# EAGLE board sparkfun-atsamd21g-breakout-Panel-v10 (EAGLE 7.4.0), part 1 of 11
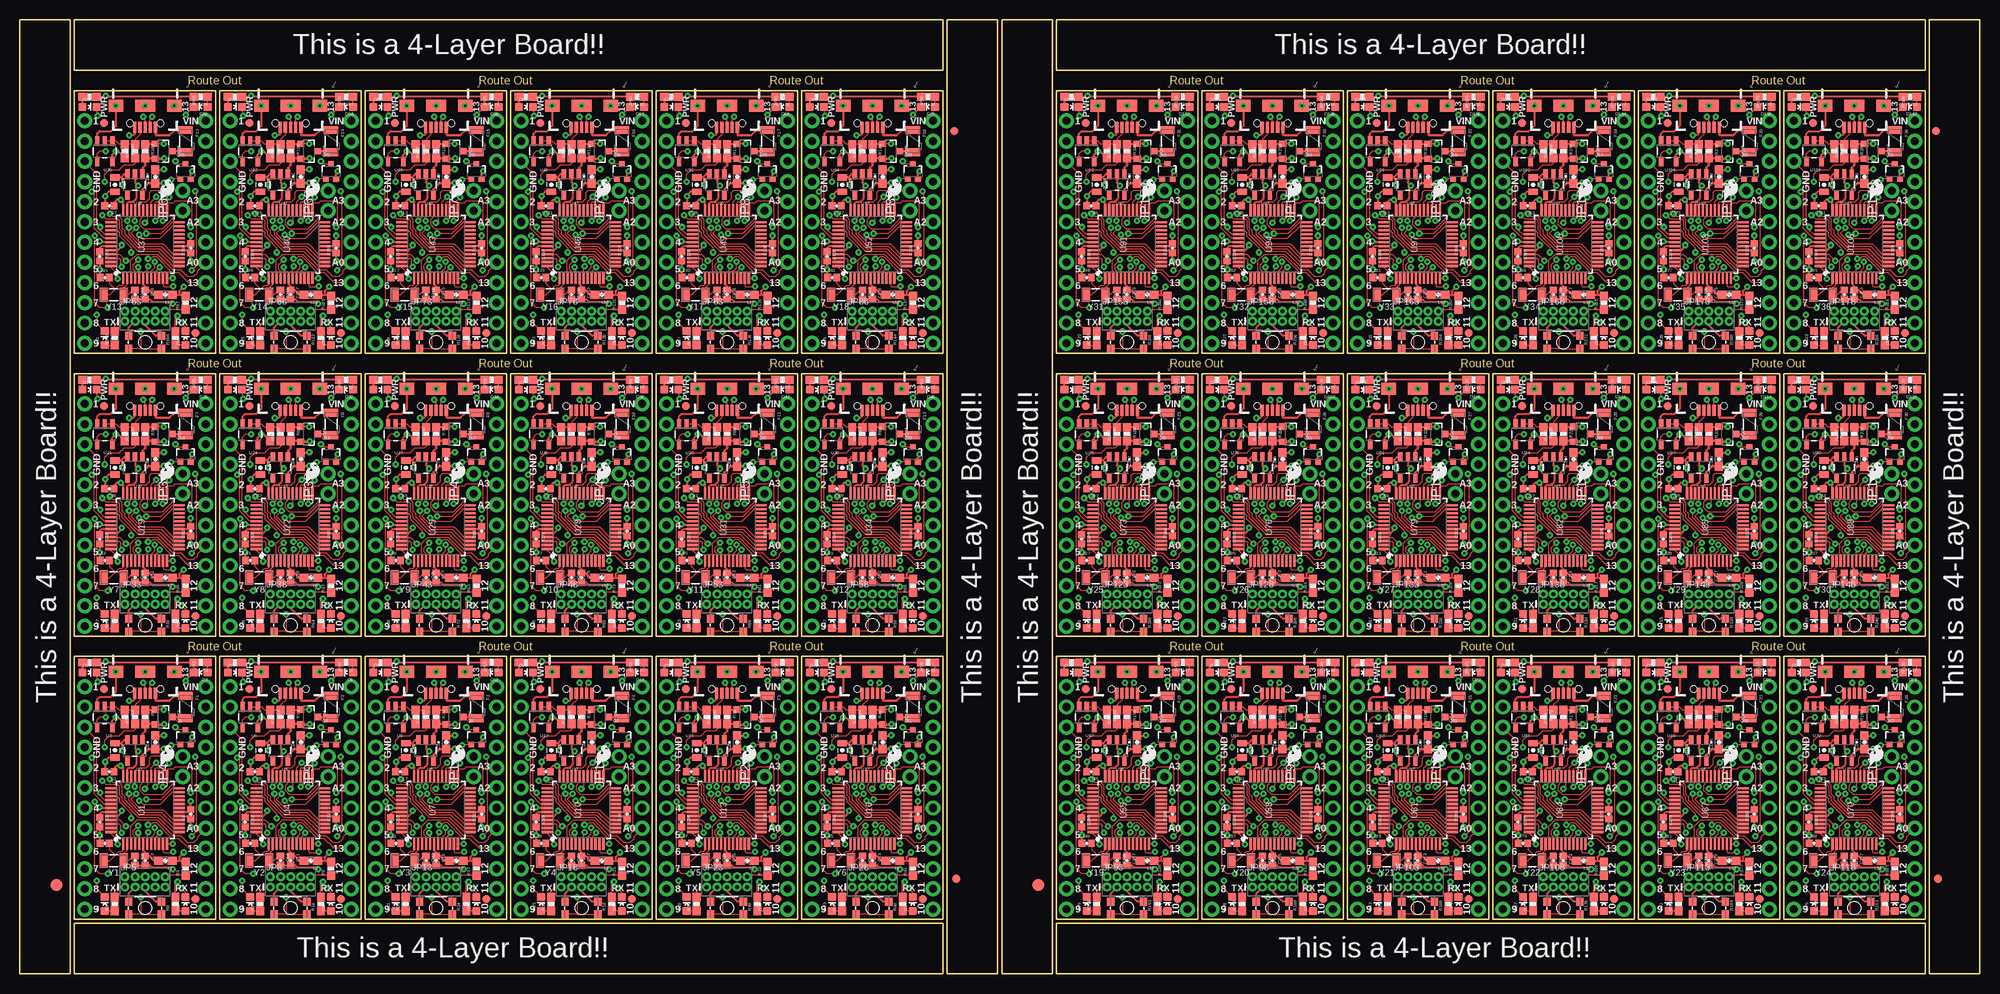
[diagram p0: board, top side]
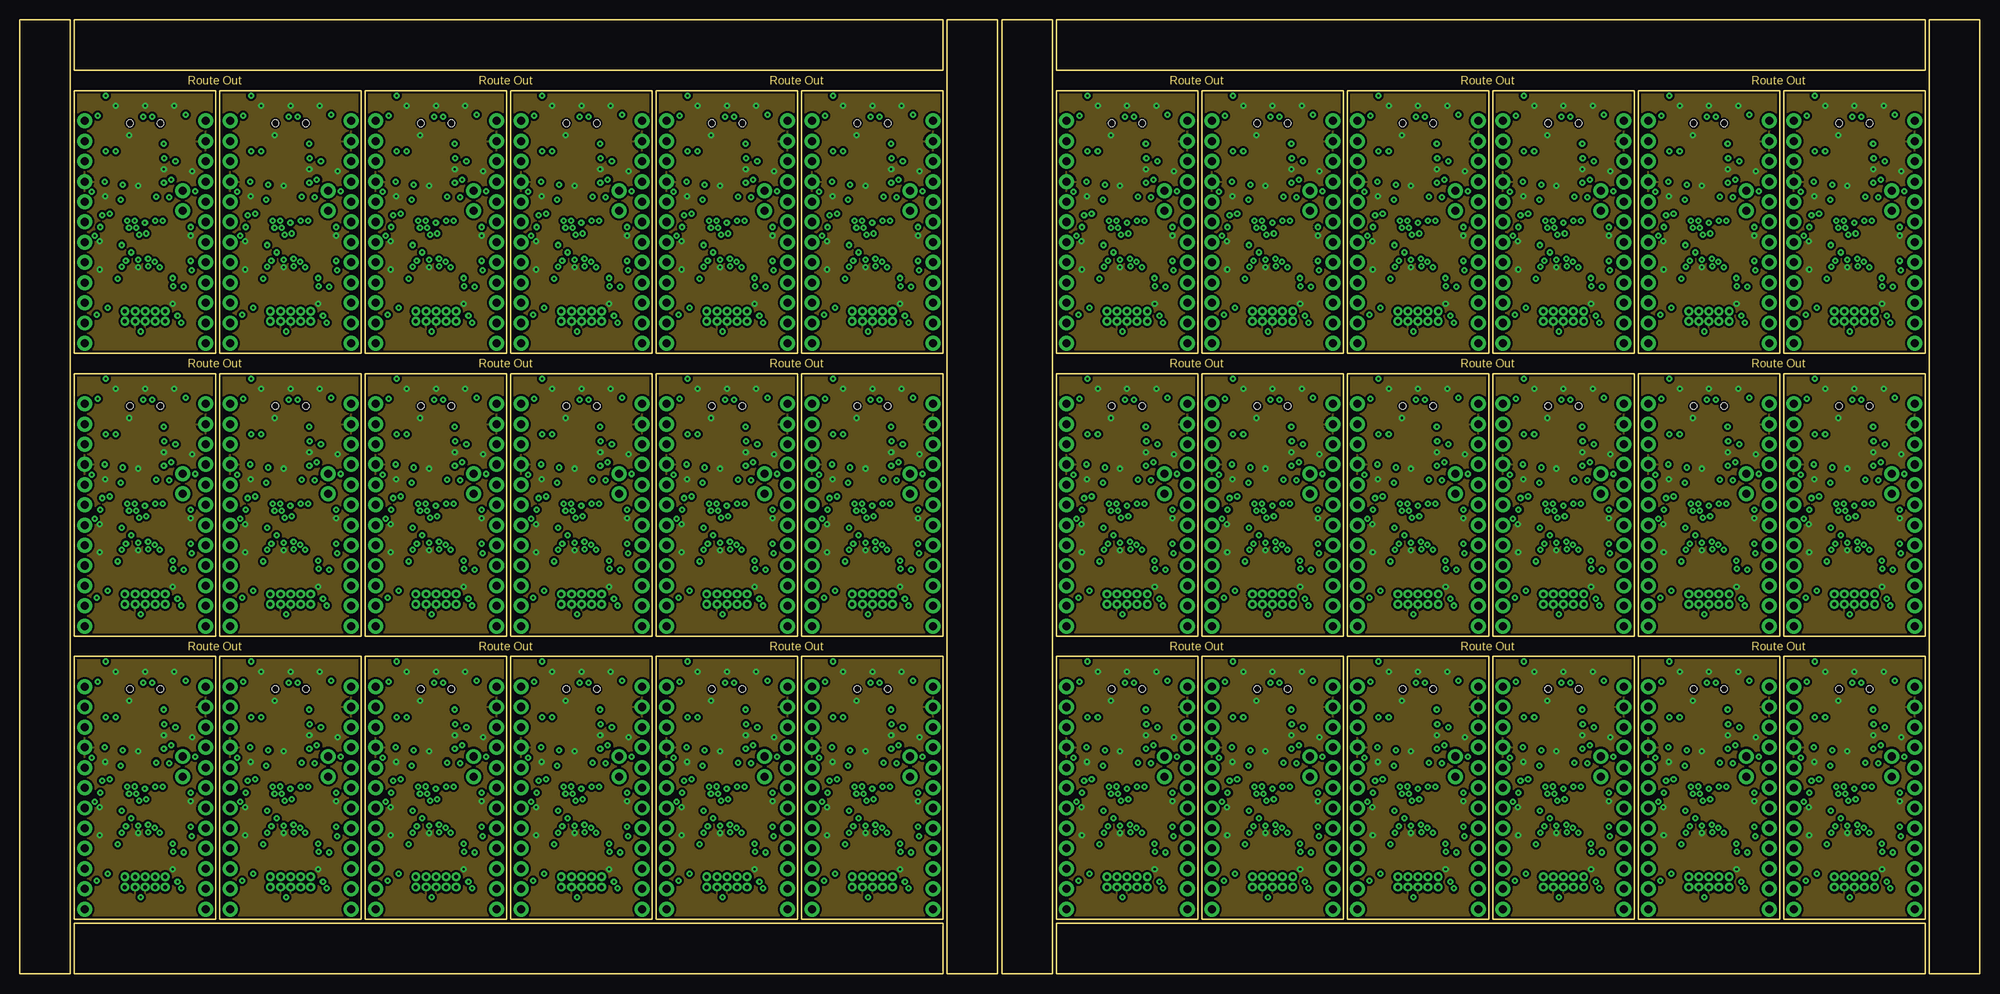
[diagram p1: board, inner layer Route2]
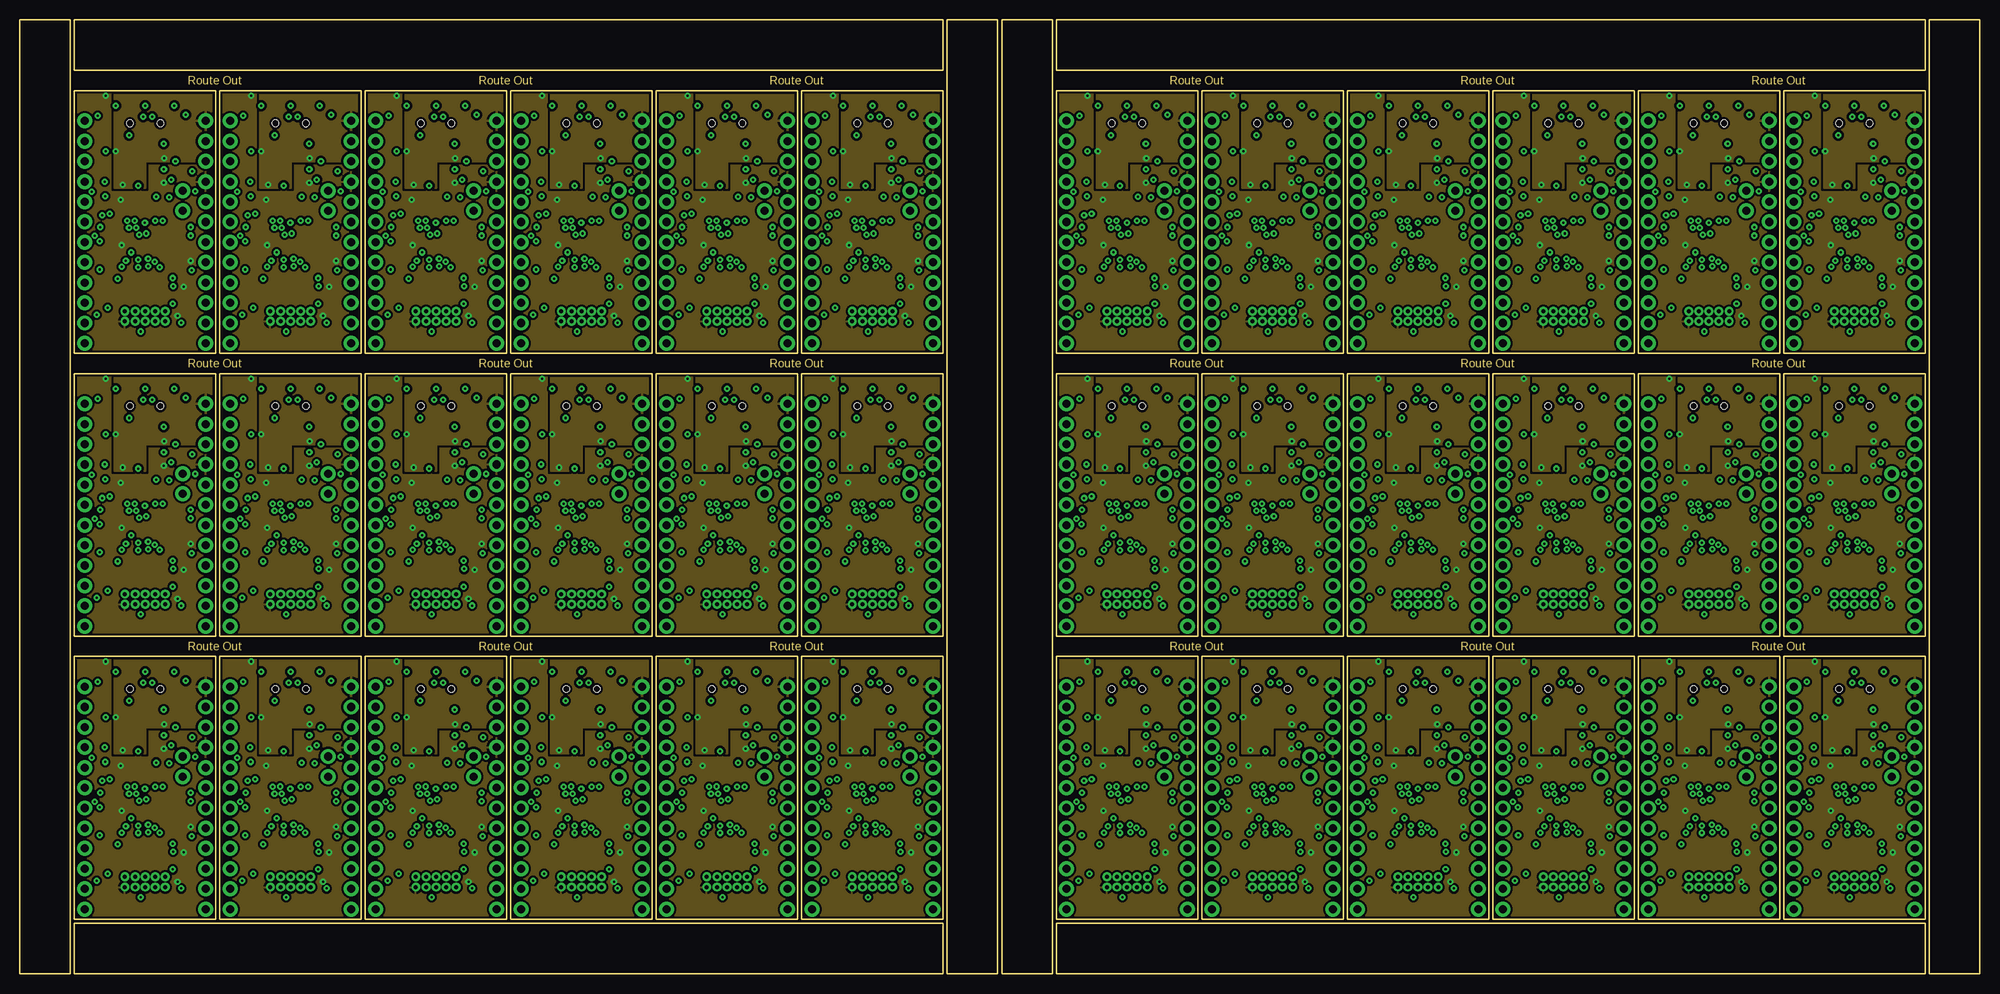
[diagram p2: board, inner layer Route15]
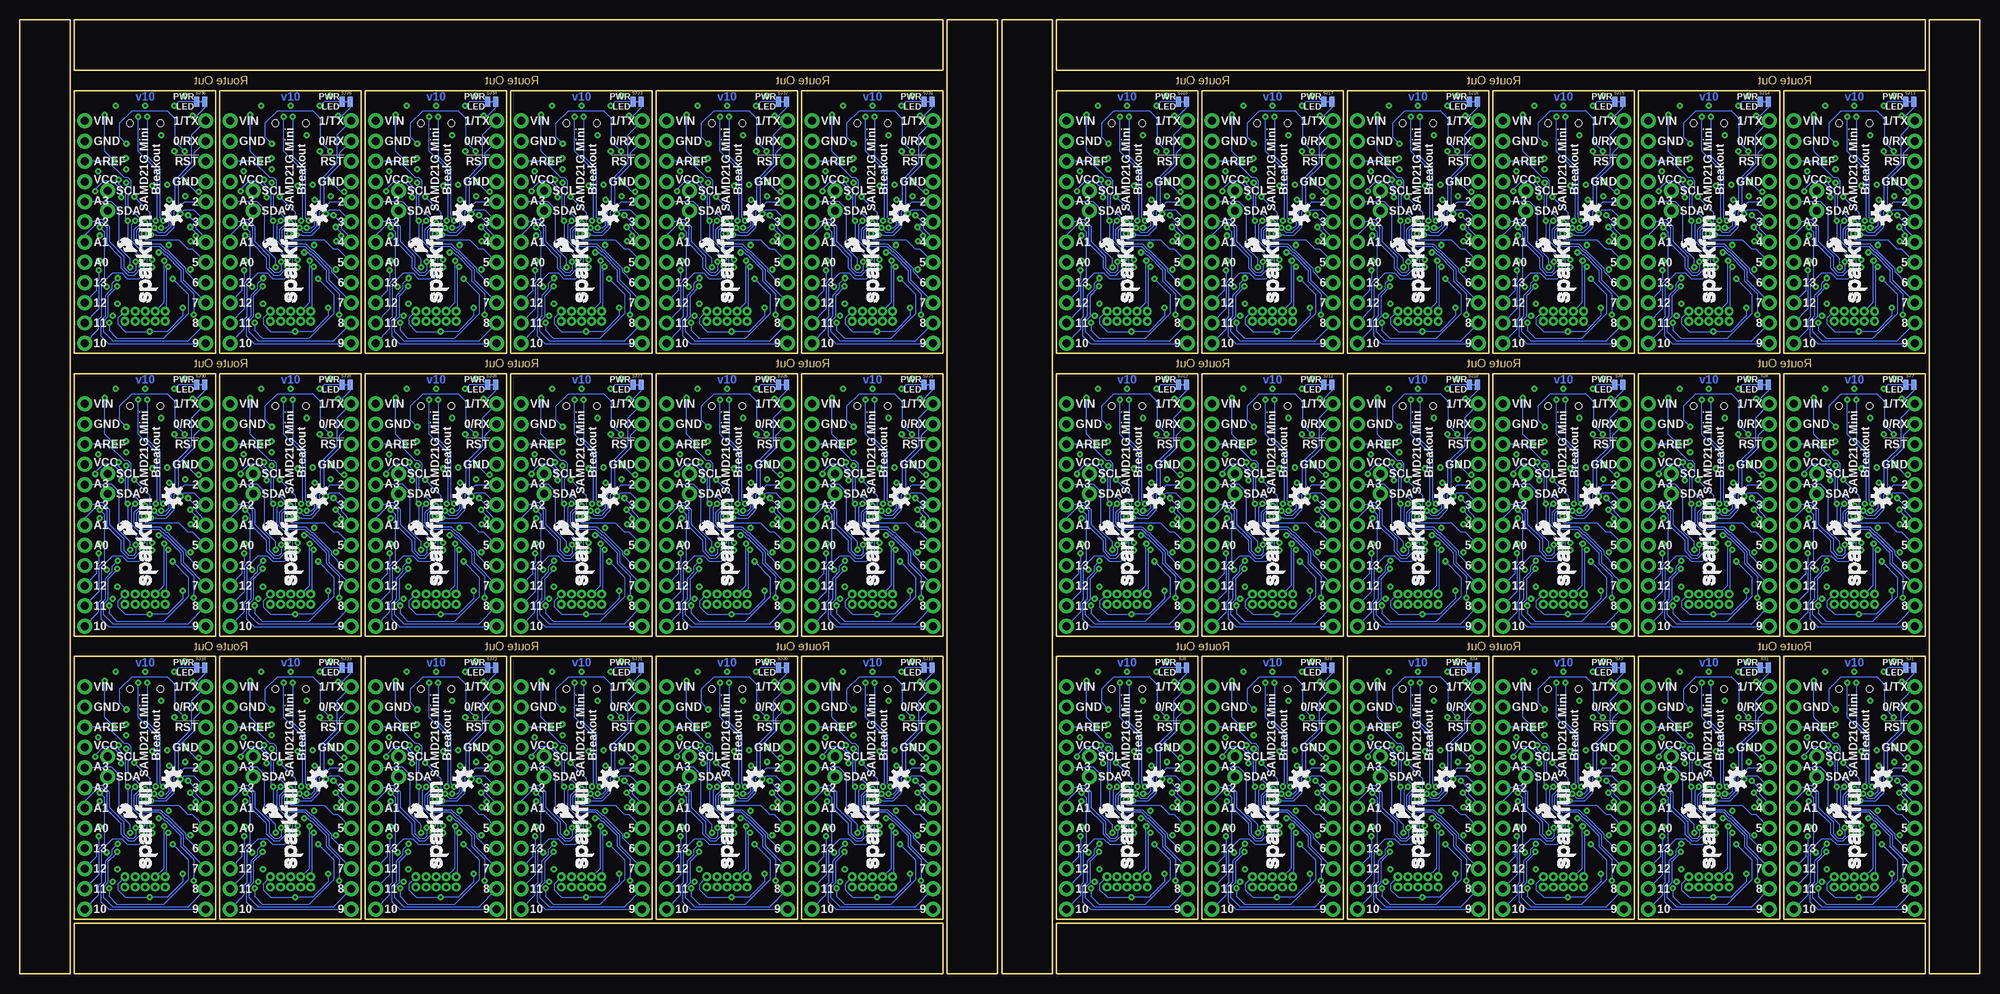
[diagram p3: board, bottom side, seen from below]

Size 246.38 x 119.89 mm. Coordinates in mm from the lower left corner, seen from the top.
Outline: 192 segments
Copper layers (1*2*15*16): Top 0.035mm / dielectric 1.5mm / Route2 0.035mm / dielectric 0.15mm / Route15 0.035mm / dielectric 0.2mm / Bottom 0.035mm
Design rules "SparkFun-4-layer *": minimum track width 6mil, minimum drill 10mil, track to track 6mil, track to pad 6mil, pad to pad 6mil, via to via 6mil, smd to smd 6mil, copper to edge 6mil, drill to drill 8mil, minimum pad ring 12mil, minimum via ring 10mil, stop-mask expansion 4mil, vias tented up to drill 20mil, thermal gap 12mil

## Footprints (pad centres in the part's own frame; a part is rotated, then mirrored left to right if it is on the bottom)
0402-CAP = smd 0.85 x 0.9: 1 -0.58,0; 2 0.58,0
0805-CAP = smd 0.8 x 1.2: 1 -0.9,0; 2 0.9,0
0603-CAP = smd 1.1 x 1: 1 -0.85,0; 2 0.85,0
LED-0603 = smd 1 x 1: A 0,-0.877; C 0,0.877
FIDUCIAL-1.5X3 = smd 1.5 x 1.5: 1 0,0
FIDUCIAL-1X2 = smd 1 x 1: 1 0,0
PTC-1206 = smd 1 x 1.8: 1 -1.4,0; 2 1.4,0
1X12_NO_SILK = drill 1.016 pad 1.88: 1 0,0; 2 2.54,0; 3 5.08,0; 4 7.62,0; 5 10.16,0; 6 12.7,0; 7 15.24,0; 8 17.78,0; 9 20.32,0; 10 22.86,0; 11 25.4,0; 12 27.94,0
USB-AB-MICRO-SMD_V03 = smd 1.4 x 0.4: D+1 2.7,0; D-1 2.7,0.65; GND1 2.7,-1.3; ID1 2.7,-0.65; VBUS1 2.7,1.3 | smd 1.5 x 1.8: SHIELD1 0,3.68; SHIELD3 0,-3.68 | smd 1.5 x 2.5: SHIELD2 0,0 | hole 0.85: 2.2,1.9; 2.2,-1.9
1X02_NO_SILK = drill 1.016 pad 1.88: 1 0,0; 2 2.54,0
2X5-PTH-1.27MM = drill 0.508 pad 1: 1 -2.54,-0.635; 2 -2.54,0.635; 3 -1.27,-0.635; 4 -1.27,0.635; 5 0,-0.635; 6 0,0.635; 7 1.27,-0.635; 8 1.27,0.635; 9 2.54,-0.635; 10 2.54,0.635
0603 = smd 1.1 x 1: 1 -0.85,0; 2 0.85,0
SOT323 = smd 0.7 x 0.7: 1 -0.65,-0.925; 2 0.65,-0.925; 3 0,0.925
SOT23-3 = smd 0.8 x 0.9: 1 -0.95,-1; 2 0.95,-1; 3 0,1.1
0603-RES = smd 1.1 x 1: 1 -0.85,0; 2 0.85,0
TACTILE_SWITCH_SMD_4.6X2.8MM = smd 0.9 x 1: 1 -2.05,-0.8; 2 2.05,-0.8; 3 2.05,0.8; 4 -2.05,0.8
PAD-JUMPER-2-NC_BY_TRACE_NO_SILK = smd 0.635 x 1.27: 1 -0.508,0; 2 0.508,0
TQFP-48 = smd 1.5 x 0.28: 1 -4.25,2.75; 2 -4.25,2.25; 3 -4.25,1.75; 4 -4.25,1.25; 5 -4.25,0.75; 6 -4.25,0.25; 7 -4.25,-0.25; 8 -4.25,-0.75; 9 -4.25,-1.25; 10 -4.25,-1.75; 11 -4.25,-2.25; 12 -4.25,-2.75; 25 4.25,-2.75; 26 4.25,-2.25; 27 4.25,-1.75; 28 4.25,-1.25; 29 4.25,-0.75; 30 4.25,-0.25; 31 4.25,0.25; 32 4.25,0.75; 33 4.25,1.25; 34 4.25,1.75; 35 4.25,2.25; 36 4.25,2.75 | smd 0.28 x 1.5: 13 -2.75,-4.25; 14 -2.25,-4.25; 15 -1.75,-4.25; 16 -1.25,-4.25; 17 -0.75,-4.25; 18 -0.25,-4.25; 19 0.25,-4.25; 20 0.75,-4.25; 21 1.25,-4.25; 22 1.75,-4.25; 23 2.25,-4.25; 24 2.75,-4.25; 37 2.75,4.25; 38 2.25,4.25; 39 1.75,4.25; 40 1.25,4.25; 41 0.75,4.25; 42 0.25,4.25; 43 -0.25,4.25; 44 -0.75,4.25; 45 -1.25,4.25; 46 -1.75,4.25; 47 -2.25,4.25; 48 -2.75,4.25
SOT23-5 = smd 0.55 x 1.2: 1 -0.95,-1.3; 2 0,-1.3; 3 0.95,-1.3; 4 0.95,1.3; 5 -0.95,1.3
CRYSTAL-SMD-3.2X1.5MM = smd 1 x 1.8: P$1 -1.25,0; P$2 1.25,0

## Placement (x,y rotation side)
C1  0.1uF  [0402-CAP]  11.25,25.4 180 top
C2  0.1uF  [0402-CAP]  10.03,19.05 270 top
C3  0.1uF  [0402-CAP]  15.75,14.22 270 top
C4  0.1uF  [0402-CAP]  21.46,20.07 90 top
C5  15pF  [0402-CAP]  10.67,16.38 0 top
C6  15pF  [0402-CAP]  14.48,14.22 270 top
C7  1.0uF  [0805-CAP]  11.94,28.07 270 top
C8  2.2uF  [0603-CAP]  17.02,29.08 90 top
C9  0.1uF  [0402-CAP]  29.54,25.4 180 top
C10  0.1uF  [0402-CAP]  28.32,19.05 270 top
C11  0.1uF  [0402-CAP]  34.04,14.22 270 top
C12  0.1uF  [0402-CAP]  39.75,20.07 90 top
C13  15pF  [0402-CAP]  28.96,16.38 0 top
C14  15pF  [0402-CAP]  32.77,14.22 270 top
C15  1.0uF  [0805-CAP]  30.23,28.07 270 top
C16  2.2uF  [0603-CAP]  35.31,29.08 90 top
C17  0.1uF  [0402-CAP]  47.83,25.4 180 top
C18  0.1uF  [0402-CAP]  46.61,19.05 270 top
C19  0.1uF  [0402-CAP]  52.32,14.22 270 top
C20  0.1uF  [0402-CAP]  58.04,20.07 90 top
C21  15pF  [0402-CAP]  47.24,16.38 0 top
C22  15pF  [0402-CAP]  51.05,14.22 270 top
C23  1.0uF  [0805-CAP]  48.51,28.07 270 top
C24  2.2uF  [0603-CAP]  53.59,29.08 90 top
C25  0.1uF  [0402-CAP]  66.12,25.4 180 top
C26  0.1uF  [0402-CAP]  64.9,19.05 270 top
C27  0.1uF  [0402-CAP]  70.61,14.22 270 top
C28  0.1uF  [0402-CAP]  76.33,20.07 90 top
C29  15pF  [0402-CAP]  65.53,16.38 0 top
C30  15pF  [0402-CAP]  69.34,14.22 270 top
C31  1.0uF  [0805-CAP]  66.8,28.07 270 top
C32  2.2uF  [0603-CAP]  71.88,29.08 90 top
C33  0.1uF  [0402-CAP]  84.4,25.4 180 top
C34  0.1uF  [0402-CAP]  83.19,19.05 270 top
C35  0.1uF  [0402-CAP]  88.9,14.22 270 top
C36  0.1uF  [0402-CAP]  94.61,20.07 90 top
C37  15pF  [0402-CAP]  83.82,16.38 0 top
C38  15pF  [0402-CAP]  87.63,14.22 270 top
C39  1.0uF  [0805-CAP]  85.09,28.07 270 top
C40  2.2uF  [0603-CAP]  90.17,29.08 90 top
C41  0.1uF  [0402-CAP]  102.69,25.4 180 top
C42  0.1uF  [0402-CAP]  101.47,19.05 270 top
C43  0.1uF  [0402-CAP]  107.19,14.22 270 top
C44  0.1uF  [0402-CAP]  112.9,20.07 90 top
C45  15pF  [0402-CAP]  102.11,16.38 0 top
C46  15pF  [0402-CAP]  105.92,14.22 270 top
C47  1.0uF  [0805-CAP]  103.38,28.07 270 top
C48  2.2uF  [0603-CAP]  108.46,29.08 90 top
C49  0.1uF  [0402-CAP]  11.25,60.96 180 top
C50  0.1uF  [0402-CAP]  10.03,54.61 270 top
C51  0.1uF  [0402-CAP]  15.75,49.78 270 top
C52  0.1uF  [0402-CAP]  21.46,55.63 90 top
C53  15pF  [0402-CAP]  10.67,51.94 0 top
C54  15pF  [0402-CAP]  14.48,49.78 270 top
C55  1.0uF  [0805-CAP]  11.94,63.63 270 top
C56  2.2uF  [0603-CAP]  17.02,64.64 90 top
C57  0.1uF  [0402-CAP]  29.54,60.96 180 top
C58  0.1uF  [0402-CAP]  28.32,54.61 270 top
C59  0.1uF  [0402-CAP]  34.04,49.78 270 top
C60  0.1uF  [0402-CAP]  39.75,55.63 90 top
C61  15pF  [0402-CAP]  28.96,51.94 0 top
C62  15pF  [0402-CAP]  32.77,49.78 270 top
C63  1.0uF  [0805-CAP]  30.23,63.63 270 top
C64  2.2uF  [0603-CAP]  35.31,64.64 90 top
C65  0.1uF  [0402-CAP]  47.83,60.96 180 top
C66  0.1uF  [0402-CAP]  46.61,54.61 270 top
C67  0.1uF  [0402-CAP]  52.32,49.78 270 top
C68  0.1uF  [0402-CAP]  58.04,55.63 90 top
C69  15pF  [0402-CAP]  47.24,51.94 0 top
C70  15pF  [0402-CAP]  51.05,49.78 270 top
C71  1.0uF  [0805-CAP]  48.51,63.63 270 top
C72  2.2uF  [0603-CAP]  53.59,64.64 90 top
C73  0.1uF  [0402-CAP]  66.12,60.96 180 top
C74  0.1uF  [0402-CAP]  64.9,54.61 270 top
C75  0.1uF  [0402-CAP]  70.61,49.78 270 top
C76  0.1uF  [0402-CAP]  76.33,55.63 90 top
C77  15pF  [0402-CAP]  65.53,51.94 0 top
C78  15pF  [0402-CAP]  69.34,49.78 270 top
C79  1.0uF  [0805-CAP]  66.8,63.63 270 top
C80  2.2uF  [0603-CAP]  71.88,64.64 90 top
C81  0.1uF  [0402-CAP]  84.4,60.96 180 top
C82  0.1uF  [0402-CAP]  83.19,54.61 270 top
C83  0.1uF  [0402-CAP]  88.9,49.78 270 top
C84  0.1uF  [0402-CAP]  94.61,55.63 90 top
C85  15pF  [0402-CAP]  83.82,51.94 0 top
C86  15pF  [0402-CAP]  87.63,49.78 270 top
C87  1.0uF  [0805-CAP]  85.09,63.63 270 top
C88  2.2uF  [0603-CAP]  90.17,64.64 90 top
C89  0.1uF  [0402-CAP]  102.69,60.96 180 top
C90  0.1uF  [0402-CAP]  101.47,54.61 270 top
C91  0.1uF  [0402-CAP]  107.19,49.78 270 top
C92  0.1uF  [0402-CAP]  112.9,55.63 90 top
C93  15pF  [0402-CAP]  102.11,51.94 0 top
C94  15pF  [0402-CAP]  105.92,49.78 270 top
C95  1.0uF  [0805-CAP]  103.38,63.63 270 top
C96  2.2uF  [0603-CAP]  108.46,64.64 90 top
C97  0.1uF  [0402-CAP]  11.25,96.52 180 top
C98  0.1uF  [0402-CAP]  10.03,90.17 270 top
C99  0.1uF  [0402-CAP]  15.75,85.34 270 top
C100  0.1uF  [0402-CAP]  21.46,91.19 90 top
C101  15pF  [0402-CAP]  10.67,87.5 0 top
C102  15pF  [0402-CAP]  14.48,85.34 270 top
C103  1.0uF  [0805-CAP]  11.94,99.19 270 top
C104  2.2uF  [0603-CAP]  17.02,100.2 90 top
C105  0.1uF  [0402-CAP]  29.54,96.52 180 top
C106  0.1uF  [0402-CAP]  28.32,90.17 270 top
C107  0.1uF  [0402-CAP]  34.04,85.34 270 top
C108  0.1uF  [0402-CAP]  39.75,91.19 90 top
C109  15pF  [0402-CAP]  28.96,87.5 0 top
C110  15pF  [0402-CAP]  32.77,85.34 270 top
C111  1.0uF  [0805-CAP]  30.23,99.19 270 top
C112  2.2uF  [0603-CAP]  35.31,100.2 90 top
C113  0.1uF  [0402-CAP]  47.83,96.52 180 top
C114  0.1uF  [0402-CAP]  46.61,90.17 270 top
C115  0.1uF  [0402-CAP]  52.32,85.34 270 top
C116  0.1uF  [0402-CAP]  58.04,91.19 90 top
C117  15pF  [0402-CAP]  47.24,87.5 0 top
C118  15pF  [0402-CAP]  51.05,85.34 270 top
C119  1.0uF  [0805-CAP]  48.51,99.19 270 top
C120  2.2uF  [0603-CAP]  53.59,100.2 90 top
C121  0.1uF  [0402-CAP]  66.12,96.52 180 top
C122  0.1uF  [0402-CAP]  64.9,90.17 270 top
C123  0.1uF  [0402-CAP]  70.61,85.34 270 top
C124  0.1uF  [0402-CAP]  76.33,91.19 90 top
C125  15pF  [0402-CAP]  65.53,87.5 0 top
C126  15pF  [0402-CAP]  69.34,85.34 270 top
C127  1.0uF  [0805-CAP]  66.8,99.19 270 top
C128  2.2uF  [0603-CAP]  71.88,100.2 90 top
C129  0.1uF  [0402-CAP]  84.4,96.52 180 top
C130  0.1uF  [0402-CAP]  83.19,90.17 270 top
C131  0.1uF  [0402-CAP]  88.9,85.34 270 top
C132  0.1uF  [0402-CAP]  94.61,91.19 90 top
C133  15pF  [0402-CAP]  83.82,87.5 0 top
C134  15pF  [0402-CAP]  87.63,85.34 270 top
C135  1.0uF  [0805-CAP]  85.09,99.19 270 top
C136  2.2uF  [0603-CAP]  90.17,100.2 90 top
C137  0.1uF  [0402-CAP]  102.69,96.52 180 top
C138  0.1uF  [0402-CAP]  101.47,90.17 270 top
C139  0.1uF  [0402-CAP]  107.19,85.34 270 top
C140  0.1uF  [0402-CAP]  112.9,91.19 90 top
C141  15pF  [0402-CAP]  102.11,87.5 0 top
C142  15pF  [0402-CAP]  105.92,85.34 270 top
C143  1.0uF  [0805-CAP]  103.38,99.19 270 top
C144  2.2uF  [0603-CAP]  108.46,100.2 90 top
C145  0.1uF  [0402-CAP]  134.7,25.4 180 top
C146  0.1uF  [0402-CAP]  133.48,19.05 270 top
C147  0.1uF  [0402-CAP]  139.19,14.22 270 top
C148  0.1uF  [0402-CAP]  144.91,20.07 90 top
C149  15pF  [0402-CAP]  134.11,16.38 0 top
C150  15pF  [0402-CAP]  137.92,14.22 270 top
C151  1.0uF  [0805-CAP]  135.38,28.07 270 top
C152  2.2uF  [0603-CAP]  140.46,29.08 90 top
C153  0.1uF  [0402-CAP]  152.98,25.4 180 top
C154  0.1uF  [0402-CAP]  151.76,19.05 270 top
C155  0.1uF  [0402-CAP]  157.48,14.22 270 top
C156  0.1uF  [0402-CAP]  163.19,20.07 90 top
C157  15pF  [0402-CAP]  152.4,16.38 0 top
C158  15pF  [0402-CAP]  156.21,14.22 270 top
C159  1.0uF  [0805-CAP]  153.67,28.07 270 top
C160  2.2uF  [0603-CAP]  158.75,29.08 90 top
C161  0.1uF  [0402-CAP]  171.27,25.4 180 top
C162  0.1uF  [0402-CAP]  170.05,19.05 270 top
C163  0.1uF  [0402-CAP]  175.77,14.22 270 top
C164  0.1uF  [0402-CAP]  181.48,20.07 90 top
C165  15pF  [0402-CAP]  170.69,16.38 0 top
C166  15pF  [0402-CAP]  174.5,14.22 270 top
C167  1.0uF  [0805-CAP]  171.96,28.07 270 top
C168  2.2uF  [0603-CAP]  177.04,29.08 90 top
C169  0.1uF  [0402-CAP]  189.56,25.4 180 top
C170  0.1uF  [0402-CAP]  188.34,19.05 270 top
C171  0.1uF  [0402-CAP]  194.06,14.22 270 top
C172  0.1uF  [0402-CAP]  199.77,20.07 90 top
C173  15pF  [0402-CAP]  188.98,16.38 0 top
C174  15pF  [0402-CAP]  192.79,14.22 270 top
C175  1.0uF  [0805-CAP]  190.25,28.07 270 top
C176  2.2uF  [0603-CAP]  195.33,29.08 90 top
C177  0.1uF  [0402-CAP]  207.85,25.4 180 top
C178  0.1uF  [0402-CAP]  206.63,19.05 270 top
C179  0.1uF  [0402-CAP]  212.34,14.22 270 top
C180  0.1uF  [0402-CAP]  218.06,20.07 90 top
C181  15pF  [0402-CAP]  207.26,16.38 0 top
C182  15pF  [0402-CAP]  211.07,14.22 270 top
C183  1.0uF  [0805-CAP]  208.53,28.07 270 top
C184  2.2uF  [0603-CAP]  213.61,29.08 90 top
C185  0.1uF  [0402-CAP]  226.14,25.4 180 top
C186  0.1uF  [0402-CAP]  224.92,19.05 270 top
C187  0.1uF  [0402-CAP]  230.63,14.22 270 top
C188  0.1uF  [0402-CAP]  236.35,20.07 90 top
C189  15pF  [0402-CAP]  225.55,16.38 0 top
C190  15pF  [0402-CAP]  229.36,14.22 270 top
C191  1.0uF  [0805-CAP]  226.82,28.07 270 top
C192  2.2uF  [0603-CAP]  231.9,29.08 90 top
C193  0.1uF  [0402-CAP]  134.7,60.96 180 top
C194  0.1uF  [0402-CAP]  133.48,54.61 270 top
C195  0.1uF  [0402-CAP]  139.19,49.78 270 top
C196  0.1uF  [0402-CAP]  144.91,55.63 90 top
C197  15pF  [0402-CAP]  134.11,51.94 0 top
C198  15pF  [0402-CAP]  137.92,49.78 270 top
C199  1.0uF  [0805-CAP]  135.38,63.63 270 top
C200  2.2uF  [0603-CAP]  140.46,64.64 90 top
C201  0.1uF  [0402-CAP]  152.98,60.96 180 top
C202  0.1uF  [0402-CAP]  151.76,54.61 270 top
C203  0.1uF  [0402-CAP]  157.48,49.78 270 top
C204  0.1uF  [0402-CAP]  163.19,55.63 90 top
C205  15pF  [0402-CAP]  152.4,51.94 0 top
C206  15pF  [0402-CAP]  156.21,49.78 270 top
C207  1.0uF  [0805-CAP]  153.67,63.63 270 top
C208  2.2uF  [0603-CAP]  158.75,64.64 90 top
C209  0.1uF  [0402-CAP]  171.27,60.96 180 top
C210  0.1uF  [0402-CAP]  170.05,54.61 270 top
C211  0.1uF  [0402-CAP]  175.77,49.78 270 top
C212  0.1uF  [0402-CAP]  181.48,55.63 90 top
C213  15pF  [0402-CAP]  170.69,51.94 0 top
C214  15pF  [0402-CAP]  174.5,49.78 270 top
C215  1.0uF  [0805-CAP]  171.96,63.63 270 top
C216  2.2uF  [0603-CAP]  177.04,64.64 90 top
C217  0.1uF  [0402-CAP]  189.56,60.96 180 top
C218  0.1uF  [0402-CAP]  188.34,54.61 270 top
C219  0.1uF  [0402-CAP]  194.06,49.78 270 top
C220  0.1uF  [0402-CAP]  199.77,55.63 90 top
C221  15pF  [0402-CAP]  188.98,51.94 0 top
C222  15pF  [0402-CAP]  192.79,49.78 270 top
C223  1.0uF  [0805-CAP]  190.25,63.63 270 top
C224  2.2uF  [0603-CAP]  195.33,64.64 90 top
C225  0.1uF  [0402-CAP]  207.85,60.96 180 top
C226  0.1uF  [0402-CAP]  206.63,54.61 270 top
C227  0.1uF  [0402-CAP]  212.34,49.78 270 top
C228  0.1uF  [0402-CAP]  218.06,55.63 90 top
C229  15pF  [0402-CAP]  207.26,51.94 0 top
C230  15pF  [0402-CAP]  211.07,49.78 270 top
C231  1.0uF  [0805-CAP]  208.53,63.63 270 top
C232  2.2uF  [0603-CAP]  213.61,64.64 90 top
C233  0.1uF  [0402-CAP]  226.14,60.96 180 top
C234  0.1uF  [0402-CAP]  224.92,54.61 270 top
C235  0.1uF  [0402-CAP]  230.63,49.78 270 top
C236  0.1uF  [0402-CAP]  236.35,55.63 90 top
C237  15pF  [0402-CAP]  225.55,51.94 0 top
C238  15pF  [0402-CAP]  229.36,49.78 270 top
C239  1.0uF  [0805-CAP]  226.82,63.63 270 top
C240  2.2uF  [0603-CAP]  231.9,64.64 90 top
C241  0.1uF  [0402-CAP]  134.7,96.52 180 top
C242  0.1uF  [0402-CAP]  133.48,90.17 270 top
C243  0.1uF  [0402-CAP]  139.19,85.34 270 top
C244  0.1uF  [0402-CAP]  144.91,91.19 90 top
C245  15pF  [0402-CAP]  134.11,87.5 0 top
C246  15pF  [0402-CAP]  137.92,85.34 270 top
C247  1.0uF  [0805-CAP]  135.38,99.19 270 top
C248  2.2uF  [0603-CAP]  140.46,100.2 90 top
C249  0.1uF  [0402-CAP]  152.98,96.52 180 top
C250  0.1uF  [0402-CAP]  151.76,90.17 270 top
C251  0.1uF  [0402-CAP]  157.48,85.34 270 top
C252  0.1uF  [0402-CAP]  163.19,91.19 90 top
C253  15pF  [0402-CAP]  152.4,87.5 0 top
C254  15pF  [0402-CAP]  156.21,85.34 270 top
C255  1.0uF  [0805-CAP]  153.67,99.19 270 top
C256  2.2uF  [0603-CAP]  158.75,100.2 90 top
C257  0.1uF  [0402-CAP]  171.27,96.52 180 top
C258  0.1uF  [0402-CAP]  170.05,90.17 270 top
C259  0.1uF  [0402-CAP]  175.77,85.34 270 top
C260  0.1uF  [0402-CAP]  181.48,91.19 90 top
C261  15pF  [0402-CAP]  170.69,87.5 0 top
C262  15pF  [0402-CAP]  174.5,85.34 270 top
C263  1.0uF  [0805-CAP]  171.96,99.19 270 top
C264  2.2uF  [0603-CAP]  177.04,100.2 90 top
C265  0.1uF  [0402-CAP]  189.56,96.52 180 top
C266  0.1uF  [0402-CAP]  188.34,90.17 270 top
C267  0.1uF  [0402-CAP]  194.06,85.34 270 top
C268  0.1uF  [0402-CAP]  199.77,91.19 90 top
C269  15pF  [0402-CAP]  188.98,87.5 0 top
C270  15pF  [0402-CAP]  192.79,85.34 270 top
C271  1.0uF  [0805-CAP]  190.25,99.19 270 top
C272  2.2uF  [0603-CAP]  195.33,100.2 90 top
C273  0.1uF  [0402-CAP]  207.85,96.52 180 top
C274  0.1uF  [0402-CAP]  206.63,90.17 270 top
C275  0.1uF  [0402-CAP]  212.34,85.34 270 top
C276  0.1uF  [0402-CAP]  218.06,91.19 90 top
C277  15pF  [0402-CAP]  207.26,87.5 0 top
C278  15pF  [0402-CAP]  211.07,85.34 270 top
C279  1.0uF  [0805-CAP]  208.53,99.19 270 top
C280  2.2uF  [0603-CAP]  213.61,100.2 90 top
C281  0.1uF  [0402-CAP]  226.14,96.52 180 top
C282  0.1uF  [0402-CAP]  224.92,90.17 270 top
C283  0.1uF  [0402-CAP]  230.63,85.34 270 top
C284  0.1uF  [0402-CAP]  236.35,91.19 90 top
C285  15pF  [0402-CAP]  225.55,87.5 0 top
C286  15pF  [0402-CAP]  229.36,85.34 270 top
C287  1.0uF  [0805-CAP]  226.82,99.19 270 top
C288  2.2uF  [0603-CAP]  231.9,100.2 90 top
D1  GREEN  [LED-0603]  10.67,8.76 0 top
D2  RED  [LED-0603]  8.76,37.85 270 top
D3  BLUE  [LED-0603]  22.73,37.85 90 top
D4  Yellow  [LED-0603]  20.83,8.76 0 top
D5  RED  [LED-0603]  27.05,37.85 270 top
D6  BLUE  [LED-0603]  41.02,37.85 90 top
D7  GREEN  [LED-0603]  28.96,8.76 0 top
D8  Yellow  [LED-0603]  39.12,8.76 0 top
D9  RED  [LED-0603]  45.34,37.85 270 top
D10  BLUE  [LED-0603]  59.31,37.85 90 top
D11  GREEN  [LED-0603]  47.24,8.76 0 top
D12  Yellow  [LED-0603]  57.4,8.76 0 top
D13  RED  [LED-0603]  63.63,37.85 270 top
D14  BLUE  [LED-0603]  77.6,37.85 90 top
D15  GREEN  [LED-0603]  65.53,8.76 0 top
D16  Yellow  [LED-0603]  75.69,8.76 0 top
D17  RED  [LED-0603]  81.92,37.85 270 top
D18  BLUE  [LED-0603]  95.89,37.85 90 top
D19  GREEN  [LED-0603]  83.82,8.76 0 top
D20  Yellow  [LED-0603]  93.98,8.76 0 top
D21  RED  [LED-0603]  100.2,37.85 270 top
D22  BLUE  [LED-0603]  114.17,37.85 90 top
D23  GREEN  [LED-0603]  102.11,8.76 0 top
D24  Yellow  [LED-0603]  112.27,8.76 0 top
D25  RED  [LED-0603]  8.76,73.41 270 top
D26  BLUE  [LED-0603]  22.73,73.41 90 top
D27  GREEN  [LED-0603]  10.67,44.32 0 top
D28  Yellow  [LED-0603]  20.83,44.32 0 top
D29  RED  [LED-0603]  27.05,73.41 270 top
D30  BLUE  [LED-0603]  41.02,73.41 90 top
D31  GREEN  [LED-0603]  28.96,44.32 0 top
D32  Yellow  [LED-0603]  39.12,44.32 0 top
D33  RED  [LED-0603]  45.34,73.41 270 top
D34  BLUE  [LED-0603]  59.31,73.41 90 top
D35  GREEN  [LED-0603]  47.24,44.32 0 top
D36  Yellow  [LED-0603]  57.4,44.32 0 top
D37  RED  [LED-0603]  63.63,73.41 270 top
D38  BLUE  [LED-0603]  77.6,73.41 90 top
D39  GREEN  [LED-0603]  65.53,44.32 0 top
D40  Yellow  [LED-0603]  75.69,44.32 0 top
D41  RED  [LED-0603]  81.92,73.41 270 top
D42  BLUE  [LED-0603]  95.89,73.41 90 top
D43  GREEN  [LED-0603]  83.82,44.32 0 top
D44  Yellow  [LED-0603]  93.98,44.32 0 top
D45  RED  [LED-0603]  100.2,73.41 270 top
D46  BLUE  [LED-0603]  114.17,73.41 90 top
D47  GREEN  [LED-0603]  102.11,44.32 0 top
D48  Yellow  [LED-0603]  112.27,44.32 0 top
D49  RED  [LED-0603]  8.76,108.97 270 top
D50  BLUE  [LED-0603]  22.73,108.97 90 top
D51  GREEN  [LED-0603]  10.67,79.88 0 top
D52  Yellow  [LED-0603]  20.83,79.88 0 top
D53  RED  [LED-0603]  27.05,108.97 270 top
D54  BLUE  [LED-0603]  41.02,108.97 90 top
D55  GREEN  [LED-0603]  28.96,79.88 0 top
D56  Yellow  [LED-0603]  39.12,79.88 0 top
D57  RED  [LED-0603]  45.34,108.97 270 top
D58  BLUE  [LED-0603]  59.31,108.97 90 top
D59  GREEN  [LED-0603]  47.24,79.88 0 top
D60  Yellow  [LED-0603]  57.4,79.88 0 top
D61  RED  [LED-0603]  63.63,108.97 270 top
D62  BLUE  [LED-0603]  77.6,108.97 90 top
D63  GREEN  [LED-0603]  65.53,79.88 0 top
D64  Yellow  [LED-0603]  75.69,79.88 0 top
D65  RED  [LED-0603]  81.92,108.97 270 top
D66  BLUE  [LED-0603]  95.89,108.97 90 top
D67  GREEN  [LED-0603]  83.82,79.88 0 top
D68  Yellow  [LED-0603]  93.98,79.88 0 top
D69  RED  [LED-0603]  100.2,108.97 270 top
D70  BLUE  [LED-0603]  114.17,108.97 90 top
D71  GREEN  [LED-0603]  102.11,79.88 0 top
D72  Yellow  [LED-0603]  112.27,79.88 0 top
D73  RED  [LED-0603]  132.21,37.85 270 top
D74  BLUE  [LED-0603]  146.18,37.85 90 top
D75  GREEN  [LED-0603]  134.11,8.76 0 top
D76  Yellow  [LED-0603]  144.27,8.76 0 top
D77  RED  [LED-0603]  150.5,37.85 270 top
D78  BLUE  [LED-0603]  164.47,37.85 90 top
D79  GREEN  [LED-0603]  152.4,8.76 0 top
D80  Yellow  [LED-0603]  162.56,8.76 0 top
D81  RED  [LED-0603]  168.78,37.85 270 top
D82  BLUE  [LED-0603]  182.75,37.85 90 top
D83  GREEN  [LED-0603]  170.69,8.76 0 top
D84  Yellow  [LED-0603]  180.85,8.76 0 top
D85  RED  [LED-0603]  187.07,37.85 270 top
D86  BLUE  [LED-0603]  201.04,37.85 90 top
D87  GREEN  [LED-0603]  188.98,8.76 0 top
D88  Yellow  [LED-0603]  199.14,8.76 0 top
D89  RED  [LED-0603]  205.36,37.85 270 top
D90  BLUE  [LED-0603]  219.33,37.85 90 top
D91  GREEN  [LED-0603]  207.26,8.76 0 top
D92  Yellow  [LED-0603]  217.42,8.76 0 top
D93  RED  [LED-0603]  223.65,37.85 270 top
D94  BLUE  [LED-0603]  237.62,37.85 90 top
D95  GREEN  [LED-0603]  225.55,8.76 0 top
D96  Yellow  [LED-0603]  235.71,8.76 0 top
D97  RED  [LED-0603]  132.21,73.41 270 top
D98  BLUE  [LED-0603]  146.18,73.41 90 top
D99  GREEN  [LED-0603]  134.11,44.32 0 top
D100  Yellow  [LED-0603]  144.27,44.32 0 top
D101  RED  [LED-0603]  150.5,73.41 270 top
D102  BLUE  [LED-0603]  164.47,73.41 90 top
D103  GREEN  [LED-0603]  152.4,44.32 0 top
D104  Yellow  [LED-0603]  162.56,44.32 0 top
D105  RED  [LED-0603]  168.78,73.41 270 top
D106  BLUE  [LED-0603]  182.75,73.41 90 top
D107  GREEN  [LED-0603]  170.69,44.32 0 top
D108  Yellow  [LED-0603]  180.85,44.32 0 top
D109  RED  [LED-0603]  187.07,73.41 270 top
D110  BLUE  [LED-0603]  201.04,73.41 90 top
D111  GREEN  [LED-0603]  188.98,44.32 0 top
D112  Yellow  [LED-0603]  199.14,44.32 0 top
D113  RED  [LED-0603]  205.36,73.41 270 top
D114  BLUE  [LED-0603]  219.33,73.41 90 top
D115  GREEN  [LED-0603]  207.26,44.32 0 top
D116  Yellow  [LED-0603]  217.42,44.32 0 top
D117  RED  [LED-0603]  223.65,73.41 270 top
D118  BLUE  [LED-0603]  237.62,73.41 90 top
D119  GREEN  [LED-0603]  225.55,44.32 0 top
D120  Yellow  [LED-0603]  235.71,44.32 0 top
D121  RED  [LED-0603]  132.21,108.97 270 top
D122  BLUE  [LED-0603]  146.18,108.97 90 top
D123  GREEN  [LED-0603]  134.11,79.88 0 top
D124  Yellow  [LED-0603]  144.27,79.88 0 top
D125  RED  [LED-0603]  150.5,108.97 270 top
D126  BLUE  [LED-0603]  164.47,108.97 90 top
D127  GREEN  [LED-0603]  152.4,79.88 0 top
D128  Yellow  [LED-0603]  162.56,79.88 0 top
D129  RED  [LED-0603]  168.78,108.97 270 top
D130  BLUE  [LED-0603]  182.75,108.97 90 top
D131  GREEN  [LED-0603]  170.69,79.88 0 top
D132  Yellow  [LED-0603]  180.85,79.88 0 top
D133  RED  [LED-0603]  187.07,108.97 270 top
D134  BLUE  [LED-0603]  201.04,108.97 90 top
D135  GREEN  [LED-0603]  188.98,79.88 0 top
D136  Yellow  [LED-0603]  199.14,79.88 0 top
D137  RED  [LED-0603]  205.36,108.97 270 top
D138  BLUE  [LED-0603]  219.33,108.97 90 top
D139  GREEN  [LED-0603]  207.26,79.88 0 top
D140  Yellow  [LED-0603]  217.42,79.88 0 top
D141  RED  [LED-0603]  223.65,108.97 270 top
D142  BLUE  [LED-0603]  237.62,108.97 90 top
D143  GREEN  [LED-0603]  225.55,79.88 0 top
D144  Yellow  [LED-0603]  235.71,79.88 0 top
E$1  [FIDUCIAL-1.5X3]  4.57,11.18 0 top
E$2  [FIDUCIAL-1X2]  241.17,11.94 0 top
E$3  [FIDUCIAL-1X2]  240.92,105.92 180 top
E$4  [FIDUCIAL-1.5X3]  128.02,11.18 0 top
E$5  [FIDUCIAL-1X2]  117.73,11.94 0 top
E$6  [FIDUCIAL-1X2]  117.47,105.92 180 top
F1  500mA  [PTC-1206]  20.83,33.53 270 top
F2  500mA  [PTC-1206]  39.12,33.53 270 top
F3  500mA  [PTC-1206]  57.4,33.53 270 top
F4  500mA  [PTC-1206]  75.69,33.53 270 top
F5  500mA  [PTC-1206]  93.98,33.53 270 top
F6  500mA  [PTC-1206]  112.27,33.53 270 top
F7  500mA  [PTC-1206]  20.83,69.09 270 top
F8  500mA  [PTC-1206]  39.12,69.09 270 top
F9  500mA  [PTC-1206]  57.4,69.09 270 top
F10  500mA  [PTC-1206]  75.69,69.09 270 top
F11  500mA  [PTC-1206]  93.98,69.09 270 top
F12  500mA  [PTC-1206]  112.27,69.09 270 top
F13  500mA  [PTC-1206]  20.83,104.65 270 top
F14  500mA  [PTC-1206]  39.12,104.65 270 top
F15  500mA  [PTC-1206]  57.4,104.65 270 top
F16  500mA  [PTC-1206]  75.69,104.65 270 top
F17  500mA  [PTC-1206]  93.98,104.65 270 top
F18  500mA  [PTC-1206]  112.27,104.65 270 top
F19  500mA  [PTC-1206]  144.27,33.53 270 top
F20  500mA  [PTC-1206]  162.56,33.53 270 top
F21  500mA  [PTC-1206]  180.85,33.53 270 top
F22  500mA  [PTC-1206]  199.14,33.53 270 top
F23  500mA  [PTC-1206]  217.42,33.53 270 top
F24  500mA  [PTC-1206]  235.71,33.53 270 top
F25  500mA  [PTC-1206]  144.27,69.09 270 top
F26  500mA  [PTC-1206]  162.56,69.09 270 top
F27  500mA  [PTC-1206]  180.85,69.09 270 top
F28  500mA  [PTC-1206]  199.14,69.09 270 top
F29  500mA  [PTC-1206]  217.42,69.09 270 top
F30  500mA  [PTC-1206]  235.71,69.09 270 top
F31  500mA  [PTC-1206]  144.27,104.65 270 top
F32  500mA  [PTC-1206]  162.56,104.65 270 top
F33  500mA  [PTC-1206]  180.85,104.65 270 top
F34  500mA  [PTC-1206]  199.14,104.65 270 top
F35  500mA  [PTC-1206]  217.42,104.65 270 top
F36  500mA  [PTC-1206]  235.71,104.65 270 top
FID1  FIDUCIAL1X2  [FIDUCIAL-1X2]  22.1,9.4 0 top
FID2  FIDUCIAL1X2  [FIDUCIAL-1X2]  10.54,35.81 0 top
FID3  FIDUCIAL1X2  [FIDUCIAL-1X2]  40.39,9.4 0 top
FID4  FIDUCIAL1X2  [FIDUCIAL-1X2]  28.83,35.81 0 top
FID5  FIDUCIAL1X2  [FIDUCIAL-1X2]  58.67,9.4 0 top
FID6  FIDUCIAL1X2  [FIDUCIAL-1X2]  47.12,35.81 0 top
FID7  FIDUCIAL1X2  [FIDUCIAL-1X2]  76.96,9.4 0 top
FID8  FIDUCIAL1X2  [FIDUCIAL-1X2]  65.41,35.81 0 top
FID9  FIDUCIAL1X2  [FIDUCIAL-1X2]  95.25,9.4 0 top
FID10  FIDUCIAL1X2  [FIDUCIAL-1X2]  83.69,35.81 0 top
FID11  FIDUCIAL1X2  [FIDUCIAL-1X2]  113.54,9.4 0 top
FID12  FIDUCIAL1X2  [FIDUCIAL-1X2]  101.98,35.81 0 top
FID13  FIDUCIAL1X2  [FIDUCIAL-1X2]  22.1,44.96 0 top
FID14  FIDUCIAL1X2  [FIDUCIAL-1X2]  10.54,71.37 0 top
FID15  FIDUCIAL1X2  [FIDUCIAL-1X2]  40.39,44.96 0 top
FID16  FIDUCIAL1X2  [FIDUCIAL-1X2]  28.83,71.37 0 top
FID17  FIDUCIAL1X2  [FIDUCIAL-1X2]  58.67,44.96 0 top
FID18  FIDUCIAL1X2  [FIDUCIAL-1X2]  47.12,71.37 0 top
FID19  FIDUCIAL1X2  [FIDUCIAL-1X2]  76.96,44.96 0 top
FID20  FIDUCIAL1X2  [FIDUCIAL-1X2]  65.41,71.37 0 top
FID21  FIDUCIAL1X2  [FIDUCIAL-1X2]  95.25,44.96 0 top
FID22  FIDUCIAL1X2  [FIDUCIAL-1X2]  83.69,71.37 0 top
FID23  FIDUCIAL1X2  [FIDUCIAL-1X2]  113.54,44.96 0 top
FID24  FIDUCIAL1X2  [FIDUCIAL-1X2]  101.98,71.37 0 top
FID25  FIDUCIAL1X2  [FIDUCIAL-1X2]  22.1,80.52 0 top
FID26  FIDUCIAL1X2  [FIDUCIAL-1X2]  10.54,106.93 0 top
FID27  FIDUCIAL1X2  [FIDUCIAL-1X2]  40.39,80.52 0 top
FID28  FIDUCIAL1X2  [FIDUCIAL-1X2]  28.83,106.93 0 top
FID29  FIDUCIAL1X2  [FIDUCIAL-1X2]  58.67,80.52 0 top
FID30  FIDUCIAL1X2  [FIDUCIAL-1X2]  47.12,106.93 0 top
FID31  FIDUCIAL1X2  [FIDUCIAL-1X2]  76.96,80.52 0 top
FID32  FIDUCIAL1X2  [FIDUCIAL-1X2]  65.41,106.93 0 top
FID33  FIDUCIAL1X2  [FIDUCIAL-1X2]  95.25,80.52 0 top
FID34  FIDUCIAL1X2  [FIDUCIAL-1X2]  83.69,106.93 0 top
FID35  FIDUCIAL1X2  [FIDUCIAL-1X2]  113.54,80.52 0 top
FID36  FIDUCIAL1X2  [FIDUCIAL-1X2]  101.98,106.93 0 top
FID37  FIDUCIAL1X2  [FIDUCIAL-1X2]  145.54,9.4 0 top
FID38  FIDUCIAL1X2  [FIDUCIAL-1X2]  133.99,35.81 0 top
FID39  FIDUCIAL1X2  [FIDUCIAL-1X2]  163.83,9.4 0 top
FID40  FIDUCIAL1X2  [FIDUCIAL-1X2]  152.27,35.81 0 top
FID41  FIDUCIAL1X2  [FIDUCIAL-1X2]  182.12,9.4 0 top
FID42  FIDUCIAL1X2  [FIDUCIAL-1X2]  170.56,35.81 0 top
FID43  FIDUCIAL1X2  [FIDUCIAL-1X2]  200.41,9.4 0 top
FID44  FIDUCIAL1X2  [FIDUCIAL-1X2]  188.85,35.81 0 top
FID45  FIDUCIAL1X2  [FIDUCIAL-1X2]  218.69,9.4 0 top
FID46  FIDUCIAL1X2  [FIDUCIAL-1X2]  207.14,35.81 0 top
FID47  FIDUCIAL1X2  [FIDUCIAL-1X2]  236.98,9.4 0 top
FID48  FIDUCIAL1X2  [FIDUCIAL-1X2]  225.43,35.81 0 top
FID49  FIDUCIAL1X2  [FIDUCIAL-1X2]  145.54,44.96 0 top
FID50  FIDUCIAL1X2  [FIDUCIAL-1X2]  133.99,71.37 0 top
FID51  FIDUCIAL1X2  [FIDUCIAL-1X2]  163.83,44.96 0 top
FID52  FIDUCIAL1X2  [FIDUCIAL-1X2]  152.27,71.37 0 top
FID53  FIDUCIAL1X2  [FIDUCIAL-1X2]  182.12,44.96 0 top
FID54  FIDUCIAL1X2  [FIDUCIAL-1X2]  170.56,71.37 0 top
FID55  FIDUCIAL1X2  [FIDUCIAL-1X2]  200.41,44.96 0 top
FID56  FIDUCIAL1X2  [FIDUCIAL-1X2]  188.85,71.37 0 top
FID57  FIDUCIAL1X2  [FIDUCIAL-1X2]  218.69,44.96 0 top
FID58  FIDUCIAL1X2  [FIDUCIAL-1X2]  207.14,71.37 0 top
FID59  FIDUCIAL1X2  [FIDUCIAL-1X2]  236.98,44.96 0 top
FID60  FIDUCIAL1X2  [FIDUCIAL-1X2]  225.43,71.37 0 top
FID61  FIDUCIAL1X2  [FIDUCIAL-1X2]  145.54,80.52 0 top
FID62  FIDUCIAL1X2  [FIDUCIAL-1X2]  133.99,106.93 0 top
FID63  FIDUCIAL1X2  [FIDUCIAL-1X2]  163.83,80.52 0 top
FID64  FIDUCIAL1X2  [FIDUCIAL-1X2]  152.27,106.93 0 top
FID65  FIDUCIAL1X2  [FIDUCIAL-1X2]  182.12,80.52 0 top
FID66  FIDUCIAL1X2  [FIDUCIAL-1X2]  170.56,106.93 0 top
FID67  FIDUCIAL1X2  [FIDUCIAL-1X2]  200.41,80.52 0 top
FID68  FIDUCIAL1X2  [FIDUCIAL-1X2]  188.85,106.93 0 top
FID69  FIDUCIAL1X2  [FIDUCIAL-1X2]  218.69,80.52 0 top
FID70  FIDUCIAL1X2  [FIDUCIAL-1X2]  207.14,106.93 0 top
FID71  FIDUCIAL1X2  [FIDUCIAL-1X2]  236.98,80.52 0 top
FID72  FIDUCIAL1X2  [FIDUCIAL-1X2]  225.43,106.93 0 top
JP1  [1X12_NO_SILK]  8.13,8.13 90 top
JP2  [1X12_NO_SILK]  23.37,36.07 270 top
JP3  [USB-AB-MICRO-SMD_V03]  15.75,37.97 270 top
JP4  [1X02_NO_SILK]  20.45,24.77 90 top
JP5  CORTEX_DEBUGPTH  [2X5-PTH-1.27MM]  15.75,11.53 0 top
JP6  [1X12_NO_SILK]  26.42,8.13 90 top
JP7  [1X12_NO_SILK]  41.66,36.07 270 top
JP8  CORTEX_DEBUGPTH  [2X5-PTH-1.27MM]  34.04,11.53 0 top
JP9  [1X02_NO_SILK]  38.73,24.77 90 top
JP10  [USB-AB-MICRO-SMD_V03]  34.04,37.97 270 top
JP11  [1X12_NO_SILK]  44.7,8.13 90 top
JP12  [1X12_NO_SILK]  59.94,36.07 270 top
JP13  CORTEX_DEBUGPTH  [2X5-PTH-1.27MM]  52.32,11.53 0 top
JP14  [1X02_NO_SILK]  57.02,24.77 90 top
JP15  [USB-AB-MICRO-SMD_V03]  52.32,37.97 270 top
JP16  [1X12_NO_SILK]  62.99,8.13 90 top
JP17  [1X12_NO_SILK]  78.23,36.07 270 top
JP18  CORTEX_DEBUGPTH  [2X5-PTH-1.27MM]  70.61,11.53 0 top
JP19  [1X02_NO_SILK]  75.31,24.77 90 top
JP20  [USB-AB-MICRO-SMD_V03]  70.61,37.97 270 top
JP21  [1X12_NO_SILK]  81.28,8.13 90 top
JP22  [1X12_NO_SILK]  96.52,36.07 270 top
JP23  CORTEX_DEBUGPTH  [2X5-PTH-1.27MM]  88.9,11.53 0 top
JP24  [1X02_NO_SILK]  93.6,24.77 90 top
JP25  [USB-AB-MICRO-SMD_V03]  88.9,37.97 270 top
JP26  [1X12_NO_SILK]  99.57,8.13 90 top
JP27  [1X12_NO_SILK]  114.81,36.07 270 top
JP28  CORTEX_DEBUGPTH  [2X5-PTH-1.27MM]  107.19,11.53 0 top
JP29  [1X02_NO_SILK]  111.89,24.77 90 top
JP30  [USB-AB-MICRO-SMD_V03]  107.19,37.97 270 top
JP31  [1X12_NO_SILK]  8.13,43.69 90 top
JP32  [1X12_NO_SILK]  23.37,71.63 270 top
JP33  CORTEX_DEBUGPTH  [2X5-PTH-1.27MM]  15.75,47.09 0 top
JP34  [1X02_NO_SILK]  20.45,60.33 90 top
JP35  [USB-AB-MICRO-SMD_V03]  15.75,73.53 270 top
JP36  [1X12_NO_SILK]  26.42,43.69 90 top
JP37  [1X12_NO_SILK]  41.66,71.63 270 top
JP38  CORTEX_DEBUGPTH  [2X5-PTH-1.27MM]  34.04,47.09 0 top
JP39  [1X02_NO_SILK]  38.73,60.33 90 top
JP40  [USB-AB-MICRO-SMD_V03]  34.04,73.53 270 top
JP41  [1X12_NO_SILK]  44.7,43.69 90 top
JP42  [1X12_NO_SILK]  59.94,71.63 270 top
JP43  CORTEX_DEBUGPTH  [2X5-PTH-1.27MM]  52.32,47.09 0 top
JP44  [1X02_NO_SILK]  57.02,60.33 90 top
JP45  [USB-AB-MICRO-SMD_V03]  52.32,73.53 270 top
JP46  [1X12_NO_SILK]  62.99,43.69 90 top
JP47  [1X12_NO_SILK]  78.23,71.63 270 top
JP48  CORTEX_DEBUGPTH  [2X5-PTH-1.27MM]  70.61,47.09 0 top
JP49  [1X02_NO_SILK]  75.31,60.33 90 top
JP50  [USB-AB-MICRO-SMD_V03]  70.61,73.53 270 top
JP51  [1X12_NO_SILK]  81.28,43.69 90 top
JP52  [1X12_NO_SILK]  96.52,71.63 270 top
JP53  CORTEX_DEBUGPTH  [2X5-PTH-1.27MM]  88.9,47.09 0 top
JP54  [1X02_NO_SILK]  93.6,60.33 90 top
JP55  [USB-AB-MICRO-SMD_V03]  88.9,73.53 270 top
JP56  [1X12_NO_SILK]  99.57,43.69 90 top
JP57  [1X12_NO_SILK]  114.81,71.63 270 top
JP58  CORTEX_DEBUGPTH  [2X5-PTH-1.27MM]  107.19,47.09 0 top
JP59  [1X02_NO_SILK]  111.89,60.33 90 top
JP60  [USB-AB-MICRO-SMD_V03]  107.19,73.53 270 top
JP61  [1X12_NO_SILK]  8.13,79.25 90 top
JP62  [1X12_NO_SILK]  23.37,107.19 270 top
JP63  CORTEX_DEBUGPTH  [2X5-PTH-1.27MM]  15.75,82.65 0 top
JP64  [1X02_NO_SILK]  20.45,95.89 90 top
JP65  [USB-AB-MICRO-SMD_V03]  15.75,109.09 270 top
JP66  [1X12_NO_SILK]  26.42,79.25 90 top
JP67  [1X12_NO_SILK]  41.66,107.19 270 top
JP68  CORTEX_DEBUGPTH  [2X5-PTH-1.27MM]  34.04,82.65 0 top
JP69  [1X02_NO_SILK]  38.73,95.89 90 top
JP70  [USB-AB-MICRO-SMD_V03]  34.04,109.09 270 top
JP71  [1X12_NO_SILK]  44.7,79.25 90 top
JP72  [1X12_NO_SILK]  59.94,107.19 270 top
JP73  CORTEX_DEBUGPTH  [2X5-PTH-1.27MM]  52.32,82.65 0 top
JP74  [1X02_NO_SILK]  57.02,95.89 90 top
JP75  [USB-AB-MICRO-SMD_V03]  52.32,109.09 270 top
JP76  [1X12_NO_SILK]  62.99,79.25 90 top
JP77  [1X12_NO_SILK]  78.23,107.19 270 top
JP78  CORTEX_DEBUGPTH  [2X5-PTH-1.27MM]  70.61,82.65 0 top
JP79  [1X02_NO_SILK]  75.31,95.89 90 top
JP80  [USB-AB-MICRO-SMD_V03]  70.61,109.09 270 top
JP81  [1X12_NO_SILK]  81.28,79.25 90 top
JP82  [1X12_NO_SILK]  96.52,107.19 270 top
JP83  CORTEX_DEBUGPTH  [2X5-PTH-1.27MM]  88.9,82.65 0 top
JP84  [1X02_NO_SILK]  93.6,95.89 90 top
JP85  [USB-AB-MICRO-SMD_V03]  88.9,109.09 270 top
JP86  [1X12_NO_SILK]  99.57,79.25 90 top
JP87  [1X12_NO_SILK]  114.81,107.19 270 top
JP88  CORTEX_DEBUGPTH  [2X5-PTH-1.27MM]  107.19,82.65 0 top
JP89  [1X02_NO_SILK]  111.89,95.89 90 top
JP90  [USB-AB-MICRO-SMD_V03]  107.19,109.09 270 top
JP91  [1X12_NO_SILK]  131.57,8.13 90 top
JP92  [1X12_NO_SILK]  146.81,36.07 270 top
JP93  CORTEX_DEBUGPTH  [2X5-PTH-1.27MM]  139.19,11.53 0 top
JP94  [1X02_NO_SILK]  143.89,24.77 90 top
JP95  [USB-AB-MICRO-SMD_V03]  139.19,37.97 270 top
JP96  [1X12_NO_SILK]  149.86,8.13 90 top
JP97  [1X12_NO_SILK]  165.1,36.07 270 top
JP98  CORTEX_DEBUGPTH  [2X5-PTH-1.27MM]  157.48,11.53 0 top
JP99  [1X02_NO_SILK]  162.18,24.77 90 top
JP100  [USB-AB-MICRO-SMD_V03]  157.48,37.97 270 top
JP101  [1X12_NO_SILK]  168.15,8.13 90 top
JP102  [1X12_NO_SILK]  183.39,36.07 270 top
JP103  CORTEX_DEBUGPTH  [2X5-PTH-1.27MM]  175.77,11.53 0 top
JP104  [1X02_NO_SILK]  180.47,24.77 90 top
JP105  [USB-AB-MICRO-SMD_V03]  175.77,37.97 270 top
JP106  [1X12_NO_SILK]  186.44,8.13 90 top
JP107  [1X12_NO_SILK]  201.68,36.07 270 top
JP108  CORTEX_DEBUGPTH  [2X5-PTH-1.27MM]  194.06,11.53 0 top
JP109  [1X02_NO_SILK]  198.75,24.77 90 top
JP110  [USB-AB-MICRO-SMD_V03]  194.06,37.97 270 top
JP111  [1X12_NO_SILK]  204.72,8.13 90 top
JP112  [1X12_NO_SILK]  219.96,36.07 270 top
JP113  CORTEX_DEBUGPTH  [2X5-PTH-1.27MM]  212.34,11.53 0 top
JP114  [1X02_NO_SILK]  217.04,24.77 90 top
JP115  [USB-AB-MICRO-SMD_V03]  212.34,37.97 270 top
JP116  [1X12_NO_SILK]  223.01,8.13 90 top
JP117  [1X12_NO_SILK]  238.25,36.07 270 top
JP118  CORTEX_DEBUGPTH  [2X5-PTH-1.27MM]  230.63,11.53 0 top
JP119  [1X02_NO_SILK]  235.33,24.77 90 top
JP120  [USB-AB-MICRO-SMD_V03]  230.63,37.97 270 top
JP121  [1X12_NO_SILK]  131.57,43.69 90 top
JP122  [1X12_NO_SILK]  146.81,71.63 270 top
JP123  CORTEX_DEBUGPTH  [2X5-PTH-1.27MM]  139.19,47.09 0 top
JP124  [1X02_NO_SILK]  143.89,60.33 90 top
JP125  [USB-AB-MICRO-SMD_V03]  139.19,73.53 270 top
JP126  [1X12_NO_SILK]  149.86,43.69 90 top
JP127  [1X12_NO_SILK]  165.1,71.63 270 top
JP128  CORTEX_DEBUGPTH  [2X5-PTH-1.27MM]  157.48,47.09 0 top
JP129  [1X02_NO_SILK]  162.18,60.33 90 top
JP130  [USB-AB-MICRO-SMD_V03]  157.48,73.53 270 top
JP131  [1X12_NO_SILK]  168.15,43.69 90 top
JP132  [1X12_NO_SILK]  183.39,71.63 270 top
JP133  CORTEX_DEBUGPTH  [2X5-PTH-1.27MM]  175.77,47.09 0 top
JP134  [1X02_NO_SILK]  180.47,60.33 90 top
JP135  [USB-AB-MICRO-SMD_V03]  175.77,73.53 270 top
JP136  [1X12_NO_SILK]  186.44,43.69 90 top
JP137  [1X12_NO_SILK]  201.68,71.63 270 top
JP138  CORTEX_DEBUGPTH  [2X5-PTH-1.27MM]  194.06,47.09 0 top
JP139  [1X02_NO_SILK]  198.75,60.33 90 top
JP140  [USB-AB-MICRO-SMD_V03]  194.06,73.53 270 top
JP141  [1X12_NO_SILK]  204.72,43.69 90 top
JP142  [1X12_NO_SILK]  219.96,71.63 270 top
JP143  CORTEX_DEBUGPTH  [2X5-PTH-1.27MM]  212.34,47.09 0 top
JP144  [1X02_NO_SILK]  217.04,60.33 90 top
JP145  [USB-AB-MICRO-SMD_V03]  212.34,73.53 270 top
JP146  [1X12_NO_SILK]  223.01,43.69 90 top
JP147  [1X12_NO_SILK]  238.25,71.63 270 top
JP148  CORTEX_DEBUGPTH  [2X5-PTH-1.27MM]  230.63,47.09 0 top
JP149  [1X02_NO_SILK]  235.33,60.33 90 top
JP150  [USB-AB-MICRO-SMD_V03]  230.63,73.53 270 top
JP151  [1X12_NO_SILK]  131.57,79.25 90 top
JP152  [1X12_NO_SILK]  146.81,107.19 270 top
JP153  CORTEX_DEBUGPTH  [2X5-PTH-1.27MM]  139.19,82.65 0 top
JP154  [1X02_NO_SILK]  143.89,95.89 90 top
JP155  [USB-AB-MICRO-SMD_V03]  139.19,109.09 270 top
JP156  [1X12_NO_SILK]  149.86,79.25 90 top
JP157  [1X12_NO_SILK]  165.1,107.19 270 top
JP158  CORTEX_DEBUGPTH  [2X5-PTH-1.27MM]  157.48,82.65 0 top
JP159  [1X02_NO_SILK]  162.18,95.89 90 top
JP160  [USB-AB-MICRO-SMD_V03]  157.48,109.09 270 top
JP161  [1X12_NO_SILK]  168.15,79.25 90 top
JP162  [1X12_NO_SILK]  183.39,107.19 270 top
JP163  CORTEX_DEBUGPTH  [2X5-PTH-1.27MM]  175.77,82.65 0 top
JP164  [1X02_NO_SILK]  180.47,95.89 90 top
JP165  [USB-AB-MICRO-SMD_V03]  175.77,109.09 270 top
JP166  [1X12_NO_SILK]  186.44,79.25 90 top
JP167  [1X12_NO_SILK]  201.68,107.19 270 top
JP168  CORTEX_DEBUGPTH  [2X5-PTH-1.27MM]  194.06,82.65 0 top
JP169  [1X02_NO_SILK]  198.75,95.89 90 top
JP170  [USB-AB-MICRO-SMD_V03]  194.06,109.09 270 top
JP171  [1X12_NO_SILK]  204.72,79.25 90 top
JP172  [1X12_NO_SILK]  219.96,107.19 270 top
JP173  CORTEX_DEBUGPTH  [2X5-PTH-1.27MM]  212.34,82.65 0 top
JP174  [1X02_NO_SILK]  217.04,95.89 90 top
JP175  [USB-AB-MICRO-SMD_V03]  212.34,109.09 270 top
JP176  [1X12_NO_SILK]  223.01,79.25 90 top
JP177  [1X12_NO_SILK]  238.25,107.19 270 top
JP178  CORTEX_DEBUGPTH  [2X5-PTH-1.27MM]  230.63,82.65 0 top
JP179  [1X02_NO_SILK]  235.33,95.89 90 top
JP180  [USB-AB-MICRO-SMD_V03]  230.63,109.09 270 top
L1  FB - 30Ohm  [0603]  18.29,14.22 180 top
L2  FB - 30Ohm  [0603]  36.58,14.22 180 top
L3  FB - 30Ohm  [0603]  54.86,14.22 180 top
L4  FB - 30Ohm  [0603]  73.15,14.22 180 top
L5  FB - 30Ohm  [0603]  91.44,14.22 180 top
L6  FB - 30Ohm  [0603]  109.73,14.22 180 top
L7  FB - 30Ohm  [0603]  18.29,49.78 180 top
L8  FB - 30Ohm  [0603]  36.58,49.78 180 top
L9  FB - 30Ohm  [0603]  54.86,49.78 180 top
L10  FB - 30Ohm  [0603]  73.15,49.78 180 top
L11  FB - 30Ohm  [0603]  91.44,49.78 180 top
L12  FB - 30Ohm  [0603]  109.73,49.78 180 top
L13  FB - 30Ohm  [0603]  18.29,85.34 180 top
L14  FB - 30Ohm  [0603]  36.58,85.34 180 top
L15  FB - 30Ohm  [0603]  54.86,85.34 180 top
L16  FB - 30Ohm  [0603]  73.15,85.34 180 top
L17  FB - 30Ohm  [0603]  91.44,85.34 180 top
L18  FB - 30Ohm  [0603]  109.73,85.34 180 top
L19  FB - 30Ohm  [0603]  141.73,14.22 180 top
L20  FB - 30Ohm  [0603]  160.02,14.22 180 top
L21  FB - 30Ohm  [0603]  178.31,14.22 180 top
L22  FB - 30Ohm  [0603]  196.6,14.22 180 top
L23  FB - 30Ohm  [0603]  214.88,14.22 180 top
L24  FB - 30Ohm  [0603]  233.17,14.22 180 top
L25  FB - 30Ohm  [0603]  141.73,49.78 180 top
L26  FB - 30Ohm  [0603]  160.02,49.78 180 top
L27  FB - 30Ohm  [0603]  178.31,49.78 180 top
L28  FB - 30Ohm  [0603]  196.6,49.78 180 top
L29  FB - 30Ohm  [0603]  214.88,49.78 180 top
L30  FB - 30Ohm  [0603]  233.17,49.78 180 top
L31  FB - 30Ohm  [0603]  141.73,85.34 180 top
L32  FB - 30Ohm  [0603]  160.02,85.34 180 top
L33  FB - 30Ohm  [0603]  178.31,85.34 180 top
L34  FB - 30Ohm  [0603]  196.6,85.34 180 top
L35  FB - 30Ohm  [0603]  214.88,85.34 180 top
L36  FB - 30Ohm  [0603]  233.17,85.34 180 top
LOGO1  SFE_LOGO_FLAME.1_INCH  [SFE_LOGO_FLAME_.1]  17.4,25.78 0 top
LOGO2  OSHW-LOGOS  [OSHW-LOGO-S]  12.19,24.49 90 bottom
LOGO3  SFE_LOGO_NAME_FLAME.1_INCH  [SFE_LOGO_NAME_FLAME_.1]  14.07,12.8 90 bottom
LOGO4  SFE_LOGO_FLAME.1_INCH  [SFE_LOGO_FLAME_.1]  35.69,25.78 0 top
LOGO5  OSHW-LOGOS  [OSHW-LOGO-S]  30.48,24.49 90 bottom
LOGO6  SFE_LOGO_NAME_FLAME.1_INCH  [SFE_LOGO_NAME_FLAME_.1]  32.36,12.8 90 bottom
LOGO7  SFE_LOGO_FLAME.1_INCH  [SFE_LOGO_FLAME_.1]  53.98,25.78 0 top
LOGO8  OSHW-LOGOS  [OSHW-LOGO-S]  48.77,24.49 90 bottom
LOGO9  SFE_LOGO_NAME_FLAME.1_INCH  [SFE_LOGO_NAME_FLAME_.1]  50.65,12.8 90 bottom
LOGO10  SFE_LOGO_FLAME.1_INCH  [SFE_LOGO_FLAME_.1]  72.26,25.78 0 top
LOGO11  OSHW-LOGOS  [OSHW-LOGO-S]  67.06,24.49 90 bottom
LOGO12  SFE_LOGO_NAME_FLAME.1_INCH  [SFE_LOGO_NAME_FLAME_.1]  68.94,12.8 90 bottom
LOGO13  SFE_LOGO_FLAME.1_INCH  [SFE_LOGO_FLAME_.1]  90.55,25.78 0 top
LOGO14  OSHW-LOGOS  [OSHW-LOGO-S]  85.34,24.49 90 bottom
LOGO15  SFE_LOGO_NAME_FLAME.1_INCH  [SFE_LOGO_NAME_FLAME_.1]  87.22,12.8 90 bottom
LOGO16  SFE_LOGO_FLAME.1_INCH  [SFE_LOGO_FLAME_.1]  108.84,25.78 0 top
LOGO17  OSHW-LOGOS  [OSHW-LOGO-S]  103.63,24.49 90 bottom
LOGO18  SFE_LOGO_NAME_FLAME.1_INCH  [SFE_LOGO_NAME_FLAME_.1]  105.51,12.8 90 bottom
LOGO19  SFE_LOGO_FLAME.1_INCH  [SFE_LOGO_FLAME_.1]  17.4,61.34 0 top
LOGO20  OSHW-LOGOS  [OSHW-LOGO-S]  12.19,60.05 90 bottom
LOGO21  SFE_LOGO_NAME_FLAME.1_INCH  [SFE_LOGO_NAME_FLAME_.1]  14.07,48.36 90 bottom
LOGO22  SFE_LOGO_FLAME.1_INCH  [SFE_LOGO_FLAME_.1]  35.69,61.34 0 top
LOGO23  OSHW-LOGOS  [OSHW-LOGO-S]  30.48,60.05 90 bottom
LOGO24  SFE_LOGO_NAME_FLAME.1_INCH  [SFE_LOGO_NAME_FLAME_.1]  32.36,48.36 90 bottom
LOGO25  SFE_LOGO_FLAME.1_INCH  [SFE_LOGO_FLAME_.1]  53.98,61.34 0 top
LOGO26  OSHW-LOGOS  [OSHW-LOGO-S]  48.77,60.05 90 bottom
LOGO27  SFE_LOGO_NAME_FLAME.1_INCH  [SFE_LOGO_NAME_FLAME_.1]  50.65,48.36 90 bottom
LOGO28  SFE_LOGO_FLAME.1_INCH  [SFE_LOGO_FLAME_.1]  72.26,61.34 0 top
LOGO29  OSHW-LOGOS  [OSHW-LOGO-S]  67.06,60.05 90 bottom
LOGO30  SFE_LOGO_NAME_FLAME.1_INCH  [SFE_LOGO_NAME_FLAME_.1]  68.94,48.36 90 bottom
LOGO31  SFE_LOGO_FLAME.1_INCH  [SFE_LOGO_FLAME_.1]  90.55,61.34 0 top
LOGO32  OSHW-LOGOS  [OSHW-LOGO-S]  85.34,60.05 90 bottom
LOGO33  SFE_LOGO_NAME_FLAME.1_INCH  [SFE_LOGO_NAME_FLAME_.1]  87.22,48.36 90 bottom
LOGO34  SFE_LOGO_FLAME.1_INCH  [SFE_LOGO_FLAME_.1]  108.84,61.34 0 top
LOGO35  OSHW-LOGOS  [OSHW-LOGO-S]  103.63,60.05 90 bottom
LOGO36  SFE_LOGO_NAME_FLAME.1_INCH  [SFE_LOGO_NAME_FLAME_.1]  105.51,48.36 90 bottom
LOGO37  SFE_LOGO_FLAME.1_INCH  [SFE_LOGO_FLAME_.1]  17.4,96.9 0 top
LOGO38  OSHW-LOGOS  [OSHW-LOGO-S]  12.19,95.61 90 bottom
LOGO39  SFE_LOGO_NAME_FLAME.1_INCH  [SFE_LOGO_NAME_FLAME_.1]  14.07,83.92 90 bottom
LOGO40  SFE_LOGO_FLAME.1_INCH  [SFE_LOGO_FLAME_.1]  35.69,96.9 0 top
LOGO41  OSHW-LOGOS  [OSHW-LOGO-S]  30.48,95.61 90 bottom
LOGO42  SFE_LOGO_NAME_FLAME.1_INCH  [SFE_LOGO_NAME_FLAME_.1]  32.36,83.92 90 bottom
LOGO43  SFE_LOGO_FLAME.1_INCH  [SFE_LOGO_FLAME_.1]  53.98,96.9 0 top
LOGO44  OSHW-LOGOS  [OSHW-LOGO-S]  48.77,95.61 90 bottom
LOGO45  SFE_LOGO_NAME_FLAME.1_INCH  [SFE_LOGO_NAME_FLAME_.1]  50.65,83.92 90 bottom
LOGO46  SFE_LOGO_FLAME.1_INCH  [SFE_LOGO_FLAME_.1]  72.26,96.9 0 top
LOGO47  OSHW-LOGOS  [OSHW-LOGO-S]  67.06,95.61 90 bottom
LOGO48  SFE_LOGO_NAME_FLAME.1_INCH  [SFE_LOGO_NAME_FLAME_.1]  68.94,83.92 90 bottom
LOGO49  SFE_LOGO_FLAME.1_INCH  [SFE_LOGO_FLAME_.1]  90.55,96.9 0 top
LOGO50  OSHW-LOGOS  [OSHW-LOGO-S]  85.34,95.61 90 bottom
LOGO51  SFE_LOGO_NAME_FLAME.1_INCH  [SFE_LOGO_NAME_FLAME_.1]  87.22,83.92 90 bottom
LOGO52  SFE_LOGO_FLAME.1_INCH  [SFE_LOGO_FLAME_.1]  108.84,96.9 0 top
LOGO53  OSHW-LOGOS  [OSHW-LOGO-S]  103.63,95.61 90 bottom
LOGO54  SFE_LOGO_NAME_FLAME.1_INCH  [SFE_LOGO_NAME_FLAME_.1]  105.51,83.92 90 bottom
LOGO55  SFE_LOGO_FLAME.1_INCH  [SFE_LOGO_FLAME_.1]  140.84,25.78 0 top
LOGO56  OSHW-LOGOS  [OSHW-LOGO-S]  135.64,24.49 90 bottom
LOGO57  SFE_LOGO_NAME_FLAME.1_INCH  [SFE_LOGO_NAME_FLAME_.1]  137.52,12.8 90 bottom
LOGO58  SFE_LOGO_FLAME.1_INCH  [SFE_LOGO_FLAME_.1]  159.13,25.78 0 top
LOGO59  OSHW-LOGOS  [OSHW-LOGO-S]  153.92,24.49 90 bottom
LOGO60  SFE_LOGO_NAME_FLAME.1_INCH  [SFE_LOGO_NAME_FLAME_.1]  155.8,12.8 90 bottom
LOGO61  SFE_LOGO_FLAME.1_INCH  [SFE_LOGO_FLAME_.1]  177.42,25.78 0 top
LOGO62  OSHW-LOGOS  [OSHW-LOGO-S]  172.21,24.49 90 bottom
LOGO63  SFE_LOGO_NAME_FLAME.1_INCH  [SFE_LOGO_NAME_FLAME_.1]  174.09,12.8 90 bottom
LOGO64  SFE_LOGO_FLAME.1_INCH  [SFE_LOGO_FLAME_.1]  195.71,25.78 0 top
LOGO65  OSHW-LOGOS  [OSHW-LOGO-S]  190.5,24.49 90 bottom
LOGO66  SFE_LOGO_NAME_FLAME.1_INCH  [SFE_LOGO_NAME_FLAME_.1]  192.38,12.8 90 bottom
LOGO67  SFE_LOGO_FLAME.1_INCH  [SFE_LOGO_FLAME_.1]  214,25.78 0 top
LOGO68  OSHW-LOGOS  [OSHW-LOGO-S]  208.79,24.49 90 bottom
LOGO69  SFE_LOGO_NAME_FLAME.1_INCH  [SFE_LOGO_NAME_FLAME_.1]  210.67,12.8 90 bottom
LOGO70  SFE_LOGO_FLAME.1_INCH  [SFE_LOGO_FLAME_.1]  232.28,25.78 0 top
LOGO71  OSHW-LOGOS  [OSHW-LOGO-S]  227.08,24.49 90 bottom
LOGO72  SFE_LOGO_NAME_FLAME.1_INCH  [SFE_LOGO_NAME_FLAME_.1]  228.96,12.8 90 bottom
LOGO73  SFE_LOGO_FLAME.1_INCH  [SFE_LOGO_FLAME_.1]  140.84,61.34 0 top
LOGO74  OSHW-LOGOS  [OSHW-LOGO-S]  135.64,60.05 90 bottom
LOGO75  SFE_LOGO_NAME_FLAME.1_INCH  [SFE_LOGO_NAME_FLAME_.1]  137.52,48.36 90 bottom
LOGO76  SFE_LOGO_FLAME.1_INCH  [SFE_LOGO_FLAME_.1]  159.13,61.34 0 top
LOGO77  OSHW-LOGOS  [OSHW-LOGO-S]  153.92,60.05 90 bottom
LOGO78  SFE_LOGO_NAME_FLAME.1_INCH  [SFE_LOGO_NAME_FLAME_.1]  155.8,48.36 90 bottom
LOGO79  SFE_LOGO_FLAME.1_INCH  [SFE_LOGO_FLAME_.1]  177.42,61.34 0 top
LOGO80  OSHW-LOGOS  [OSHW-LOGO-S]  172.21,60.05 90 bottom
LOGO81  SFE_LOGO_NAME_FLAME.1_INCH  [SFE_LOGO_NAME_FLAME_.1]  174.09,48.36 90 bottom
LOGO82  SFE_LOGO_FLAME.1_INCH  [SFE_LOGO_FLAME_.1]  195.71,61.34 0 top
LOGO83  OSHW-LOGOS  [OSHW-LOGO-S]  190.5,60.05 90 bottom
LOGO84  SFE_LOGO_NAME_FLAME.1_INCH  [SFE_LOGO_NAME_FLAME_.1]  192.38,48.36 90 bottom
LOGO85  SFE_LOGO_FLAME.1_INCH  [SFE_LOGO_FLAME_.1]  214,61.34 0 top
LOGO86  OSHW-LOGOS  [OSHW-LOGO-S]  208.79,60.05 90 bottom
LOGO87  SFE_LOGO_NAME_FLAME.1_INCH  [SFE_LOGO_NAME_FLAME_.1]  210.67,48.36 90 bottom
LOGO88  SFE_LOGO_FLAME.1_INCH  [SFE_LOGO_FLAME_.1]  232.28,61.34 0 top
LOGO89  OSHW-LOGOS  [OSHW-LOGO-S]  227.08,60.05 90 bottom
LOGO90  SFE_LOGO_NAME_FLAME.1_INCH  [SFE_LOGO_NAME_FLAME_.1]  228.96,48.36 90 bottom
LOGO91  SFE_LOGO_FLAME.1_INCH  [SFE_LOGO_FLAME_.1]  140.84,96.9 0 top
LOGO92  OSHW-LOGOS  [OSHW-LOGO-S]  135.64,95.61 90 bottom
LOGO93  SFE_LOGO_NAME_FLAME.1_INCH  [SFE_LOGO_NAME_FLAME_.1]  137.52,83.92 90 bottom
LOGO94  SFE_LOGO_FLAME.1_INCH  [SFE_LOGO_FLAME_.1]  159.13,96.9 0 top
LOGO95  OSHW-LOGOS  [OSHW-LOGO-S]  153.92,95.61 90 bottom
LOGO96  SFE_LOGO_NAME_FLAME.1_INCH  [SFE_LOGO_NAME_FLAME_.1]  155.8,83.92 90 bottom
LOGO97  SFE_LOGO_FLAME.1_INCH  [SFE_LOGO_FLAME_.1]  177.42,96.9 0 top
LOGO98  OSHW-LOGOS  [OSHW-LOGO-S]  172.21,95.61 90 bottom
LOGO99  SFE_LOGO_NAME_FLAME.1_INCH  [SFE_LOGO_NAME_FLAME_.1]  174.09,83.92 90 bottom
LOGO100  SFE_LOGO_FLAME.1_INCH  [SFE_LOGO_FLAME_.1]  195.71,96.9 0 top
LOGO101  OSHW-LOGOS  [OSHW-LOGO-S]  190.5,95.61 90 bottom
LOGO102  SFE_LOGO_NAME_FLAME.1_INCH  [SFE_LOGO_NAME_FLAME_.1]  192.38,83.92 90 bottom
LOGO103  SFE_LOGO_FLAME.1_INCH  [SFE_LOGO_FLAME_.1]  214,96.9 0 top
LOGO104  OSHW-LOGOS  [OSHW-LOGO-S]  208.79,95.61 90 bottom
LOGO105  SFE_LOGO_NAME_FLAME.1_INCH  [SFE_LOGO_NAME_FLAME_.1]  210.67,83.92 90 bottom
LOGO106  SFE_LOGO_FLAME.1_INCH  [SFE_LOGO_FLAME_.1]  232.28,96.9 0 top
LOGO107  OSHW-LOGOS  [OSHW-LOGO-S]  227.08,95.61 90 bottom
LOGO108  SFE_LOGO_NAME_FLAME.1_INCH  [SFE_LOGO_NAME_FLAME_.1]  228.96,83.92 90 bottom
Q1  2N7002PW  [SOT323]  20.83,29.72 0 top
Q2  2.5A/30V  [SOT23-3]  18.03,32.26 270 top
Q3  2N7002PW  [SOT323]  39.12,29.72 0 top
Q4  2.5A/30V  [SOT23-3]  36.32,32.26 270 top
Q5  2N7002PW  [SOT323]  57.4,29.72 0 top
Q6  2.5A/30V  [SOT23-3]  54.61,32.26 270 top
Q7  2N7002PW  [SOT323]  75.69,29.72 0 top
Q8  2.5A/30V  [SOT23-3]  72.9,32.26 270 top
Q9  2N7002PW  [SOT323]  93.98,29.72 0 top
Q10  2.5A/30V  [SOT23-3]  91.19,32.26 270 top
Q11  2N7002PW  [SOT323]  112.27,29.72 0 top
Q12  2.5A/30V  [SOT23-3]  109.47,32.26 270 top
Q13  2N7002PW  [SOT323]  20.83,65.28 0 top
Q14  2.5A/30V  [SOT23-3]  18.03,67.82 270 top
Q15  2N7002PW  [SOT323]  39.12,65.28 0 top
Q16  2.5A/30V  [SOT23-3]  36.32,67.82 270 top
Q17  2N7002PW  [SOT323]  57.4,65.28 0 top
Q18  2.5A/30V  [SOT23-3]  54.61,67.82 270 top
Q19  2N7002PW  [SOT323]  75.69,65.28 0 top
Q20  2.5A/30V  [SOT23-3]  72.9,67.82 270 top
Q21  2N7002PW  [SOT323]  93.98,65.28 0 top
Q22  2.5A/30V  [SOT23-3]  91.19,67.82 270 top
Q23  2N7002PW  [SOT323]  112.27,65.28 0 top
Q24  2.5A/30V  [SOT23-3]  109.47,67.82 270 top
Q25  2N7002PW  [SOT323]  20.83,100.84 0 top
Q26  2.5A/30V  [SOT23-3]  18.03,103.38 270 top
Q27  2N7002PW  [SOT323]  39.12,100.84 0 top
Q28  2.5A/30V  [SOT23-3]  36.32,103.38 270 top
Q29  2N7002PW  [SOT323]  57.4,100.84 0 top
Q30  2.5A/30V  [SOT23-3]  54.61,103.38 270 top
Q31  2N7002PW  [SOT323]  75.69,100.84 0 top
Q32  2.5A/30V  [SOT23-3]  72.9,103.38 270 top
Q33  2N7002PW  [SOT323]  93.98,100.84 0 top
Q34  2.5A/30V  [SOT23-3]  91.19,103.38 270 top
Q35  2N7002PW  [SOT323]  112.27,100.84 0 top
Q36  2.5A/30V  [SOT23-3]  109.47,103.38 270 top
Q37  2N7002PW  [SOT323]  144.27,29.72 0 top
Q38  2.5A/30V  [SOT23-3]  141.48,32.26 270 top
Q39  2N7002PW  [SOT323]  162.56,29.72 0 top
Q40  2.5A/30V  [SOT23-3]  159.77,32.26 270 top
Q41  2N7002PW  [SOT323]  180.85,29.72 0 top
Q42  2.5A/30V  [SOT23-3]  178.05,32.26 270 top
Q43  2N7002PW  [SOT323]  199.14,29.72 0 top
Q44  2.5A/30V  [SOT23-3]  196.34,32.26 270 top
Q45  2N7002PW  [SOT323]  217.42,29.72 0 top
Q46  2.5A/30V  [SOT23-3]  214.63,32.26 270 top
Q47  2N7002PW  [SOT323]  235.71,29.72 0 top
Q48  2.5A/30V  [SOT23-3]  232.92,32.26 270 top
Q49  2N7002PW  [SOT323]  144.27,65.28 0 top
Q50  2.5A/30V  [SOT23-3]  141.48,67.82 270 top
Q51  2N7002PW  [SOT323]  162.56,65.28 0 top
Q52  2.5A/30V  [SOT23-3]  159.77,67.82 270 top
Q53  2N7002PW  [SOT323]  180.85,65.28 0 top
Q54  2.5A/30V  [SOT23-3]  178.05,67.82 270 top
Q55  2N7002PW  [SOT323]  199.14,65.28 0 top
Q56  2.5A/30V  [SOT23-3]  196.34,67.82 270 top
Q57  2N7002PW  [SOT323]  217.42,65.28 0 top
Q58  2.5A/30V  [SOT23-3]  214.63,67.82 270 top
Q59  2N7002PW  [SOT323]  235.71,65.28 0 top
Q60  2.5A/30V  [SOT23-3]  232.92,67.82 270 top
Q61  2N7002PW  [SOT323]  144.27,100.84 0 top
Q62  2.5A/30V  [SOT23-3]  141.48,103.38 270 top
Q63  2N7002PW  [SOT323]  162.56,100.84 0 top
Q64  2.5A/30V  [SOT23-3]  159.77,103.38 270 top
Q65  2N7002PW  [SOT323]  180.85,100.84 0 top
Q66  2.5A/30V  [SOT23-3]  178.05,103.38 270 top
Q67  2N7002PW  [SOT323]  199.14,100.84 0 top
Q68  2.5A/30V  [SOT23-3]  196.34,103.38 270 top
Q69  2N7002PW  [SOT323]  217.42,100.84 0 top
Q70  2.5A/30V  [SOT23-3]  214.63,103.38 270 top
Q71  2N7002PW  [SOT323]  235.71,100.84 0 top
Q72  2.5A/30V  [SOT23-3]  232.92,103.38 270 top
R1  10K  [0603-RES]  20.83,13.21 90 top
R2  330  [0603-RES]  8.76,39.12 0 top
R3  330  [0603-RES]  22.73,39.12 180 top
R4  100k  [0603-RES]  13.21,32.26 270 top
R5  330  [0603-RES]  14.48,32.26 90 top
R6  330  [0603-RES]  11.94,8.76 90 top
R7  47K  [0603-RES]  15.75,32.26 270 top
R8  330  [0603-RES]  19.56,8.76 90 top
R9  10K  [0603-RES]  39.12,13.21 90 top
R10  330  [0603-RES]  27.05,39.12 0 top
R11  330  [0603-RES]  41.02,39.12 180 top
R12  100k  [0603-RES]  31.5,32.26 270 top
R13  330  [0603-RES]  32.77,32.26 90 top
R14  47K  [0603-RES]  34.04,32.26 270 top
R15  330  [0603-RES]  30.23,8.76 90 top
R16  330  [0603-RES]  37.85,8.76 90 top
R17  10K  [0603-RES]  57.4,13.21 90 top
R18  330  [0603-RES]  45.34,39.12 0 top
R19  330  [0603-RES]  59.31,39.12 180 top
R20  100k  [0603-RES]  49.78,32.26 270 top